# Altium PCB Control_Board_Model_C201_FFC_Sens_Conn.PcbDoc (part 1 of 12)
Units mil, origin at the board's own origin, x right, y up, seen from the top; angles counter-clockwise.
Board outline 3937.01 x 2755.91 mil, 6 copper layers (1-SIG-TOP, 2-GND, 3-PWR, 4-SIG-HOR, 5-SIG-VERT, 6-GND-BOT), stack 46.063 mil thick; 497 components, 379 nets, 1804 pads, 1610 vias.
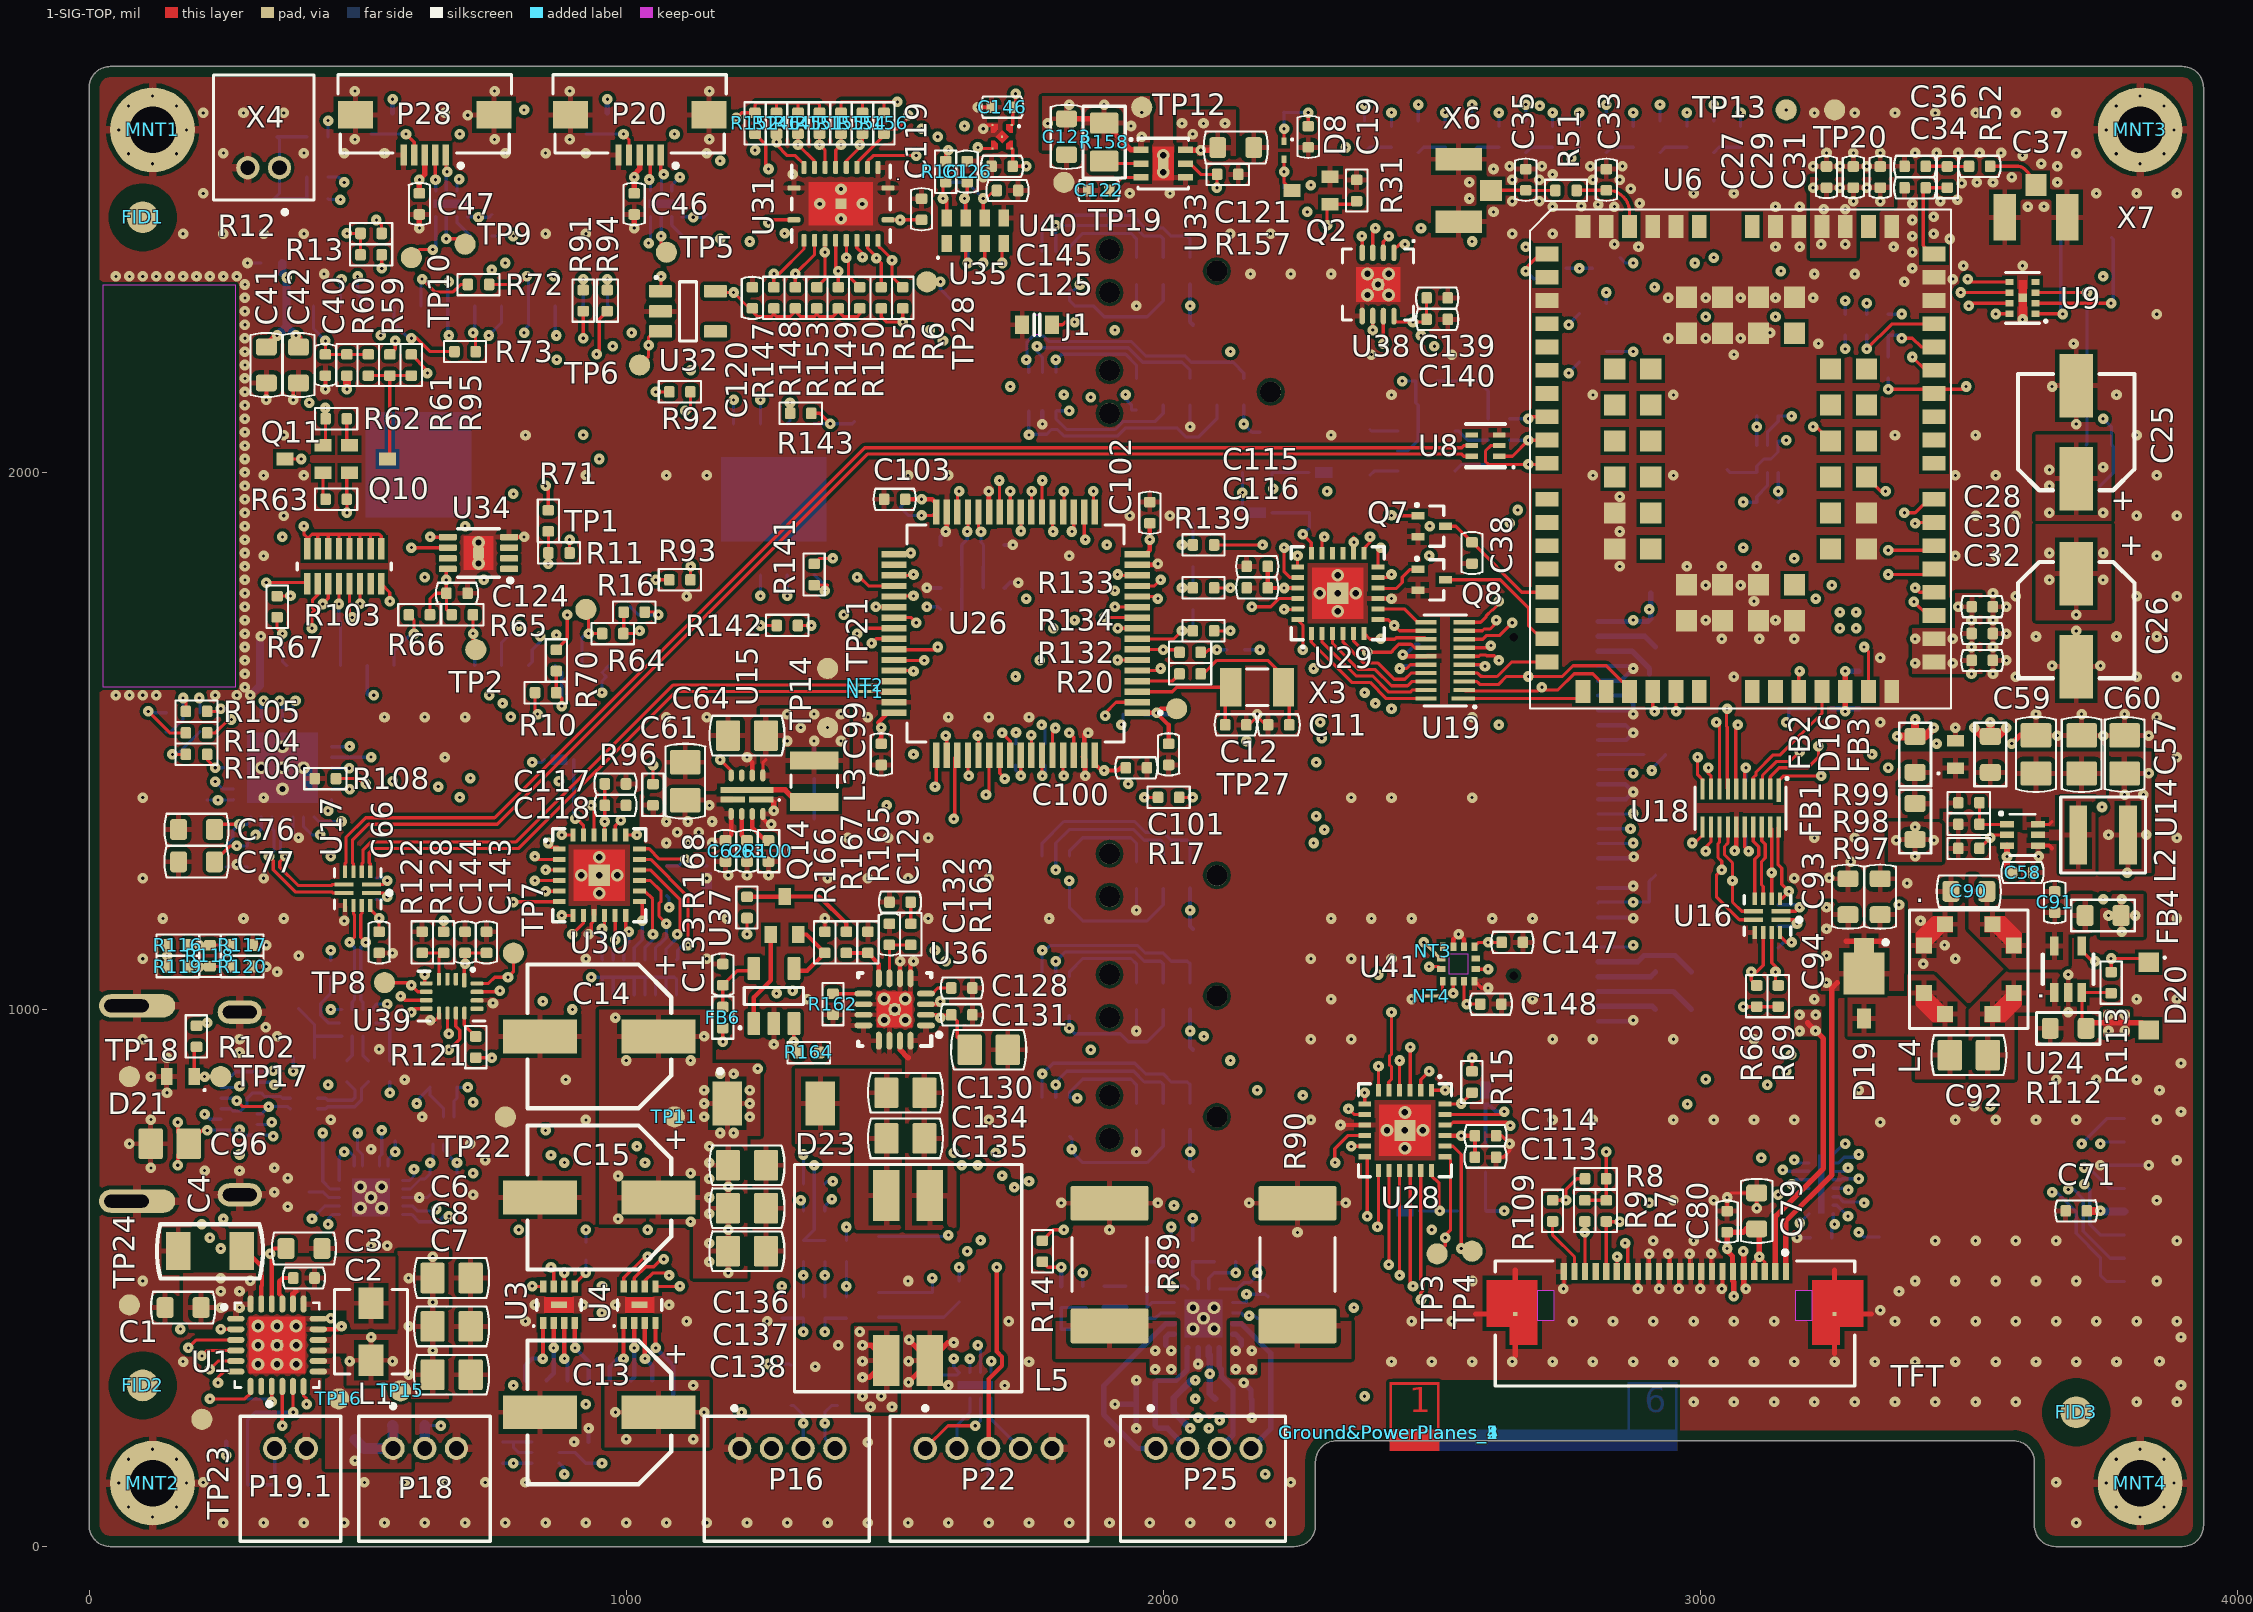
[diagram p0: 1-SIG-TOP view]
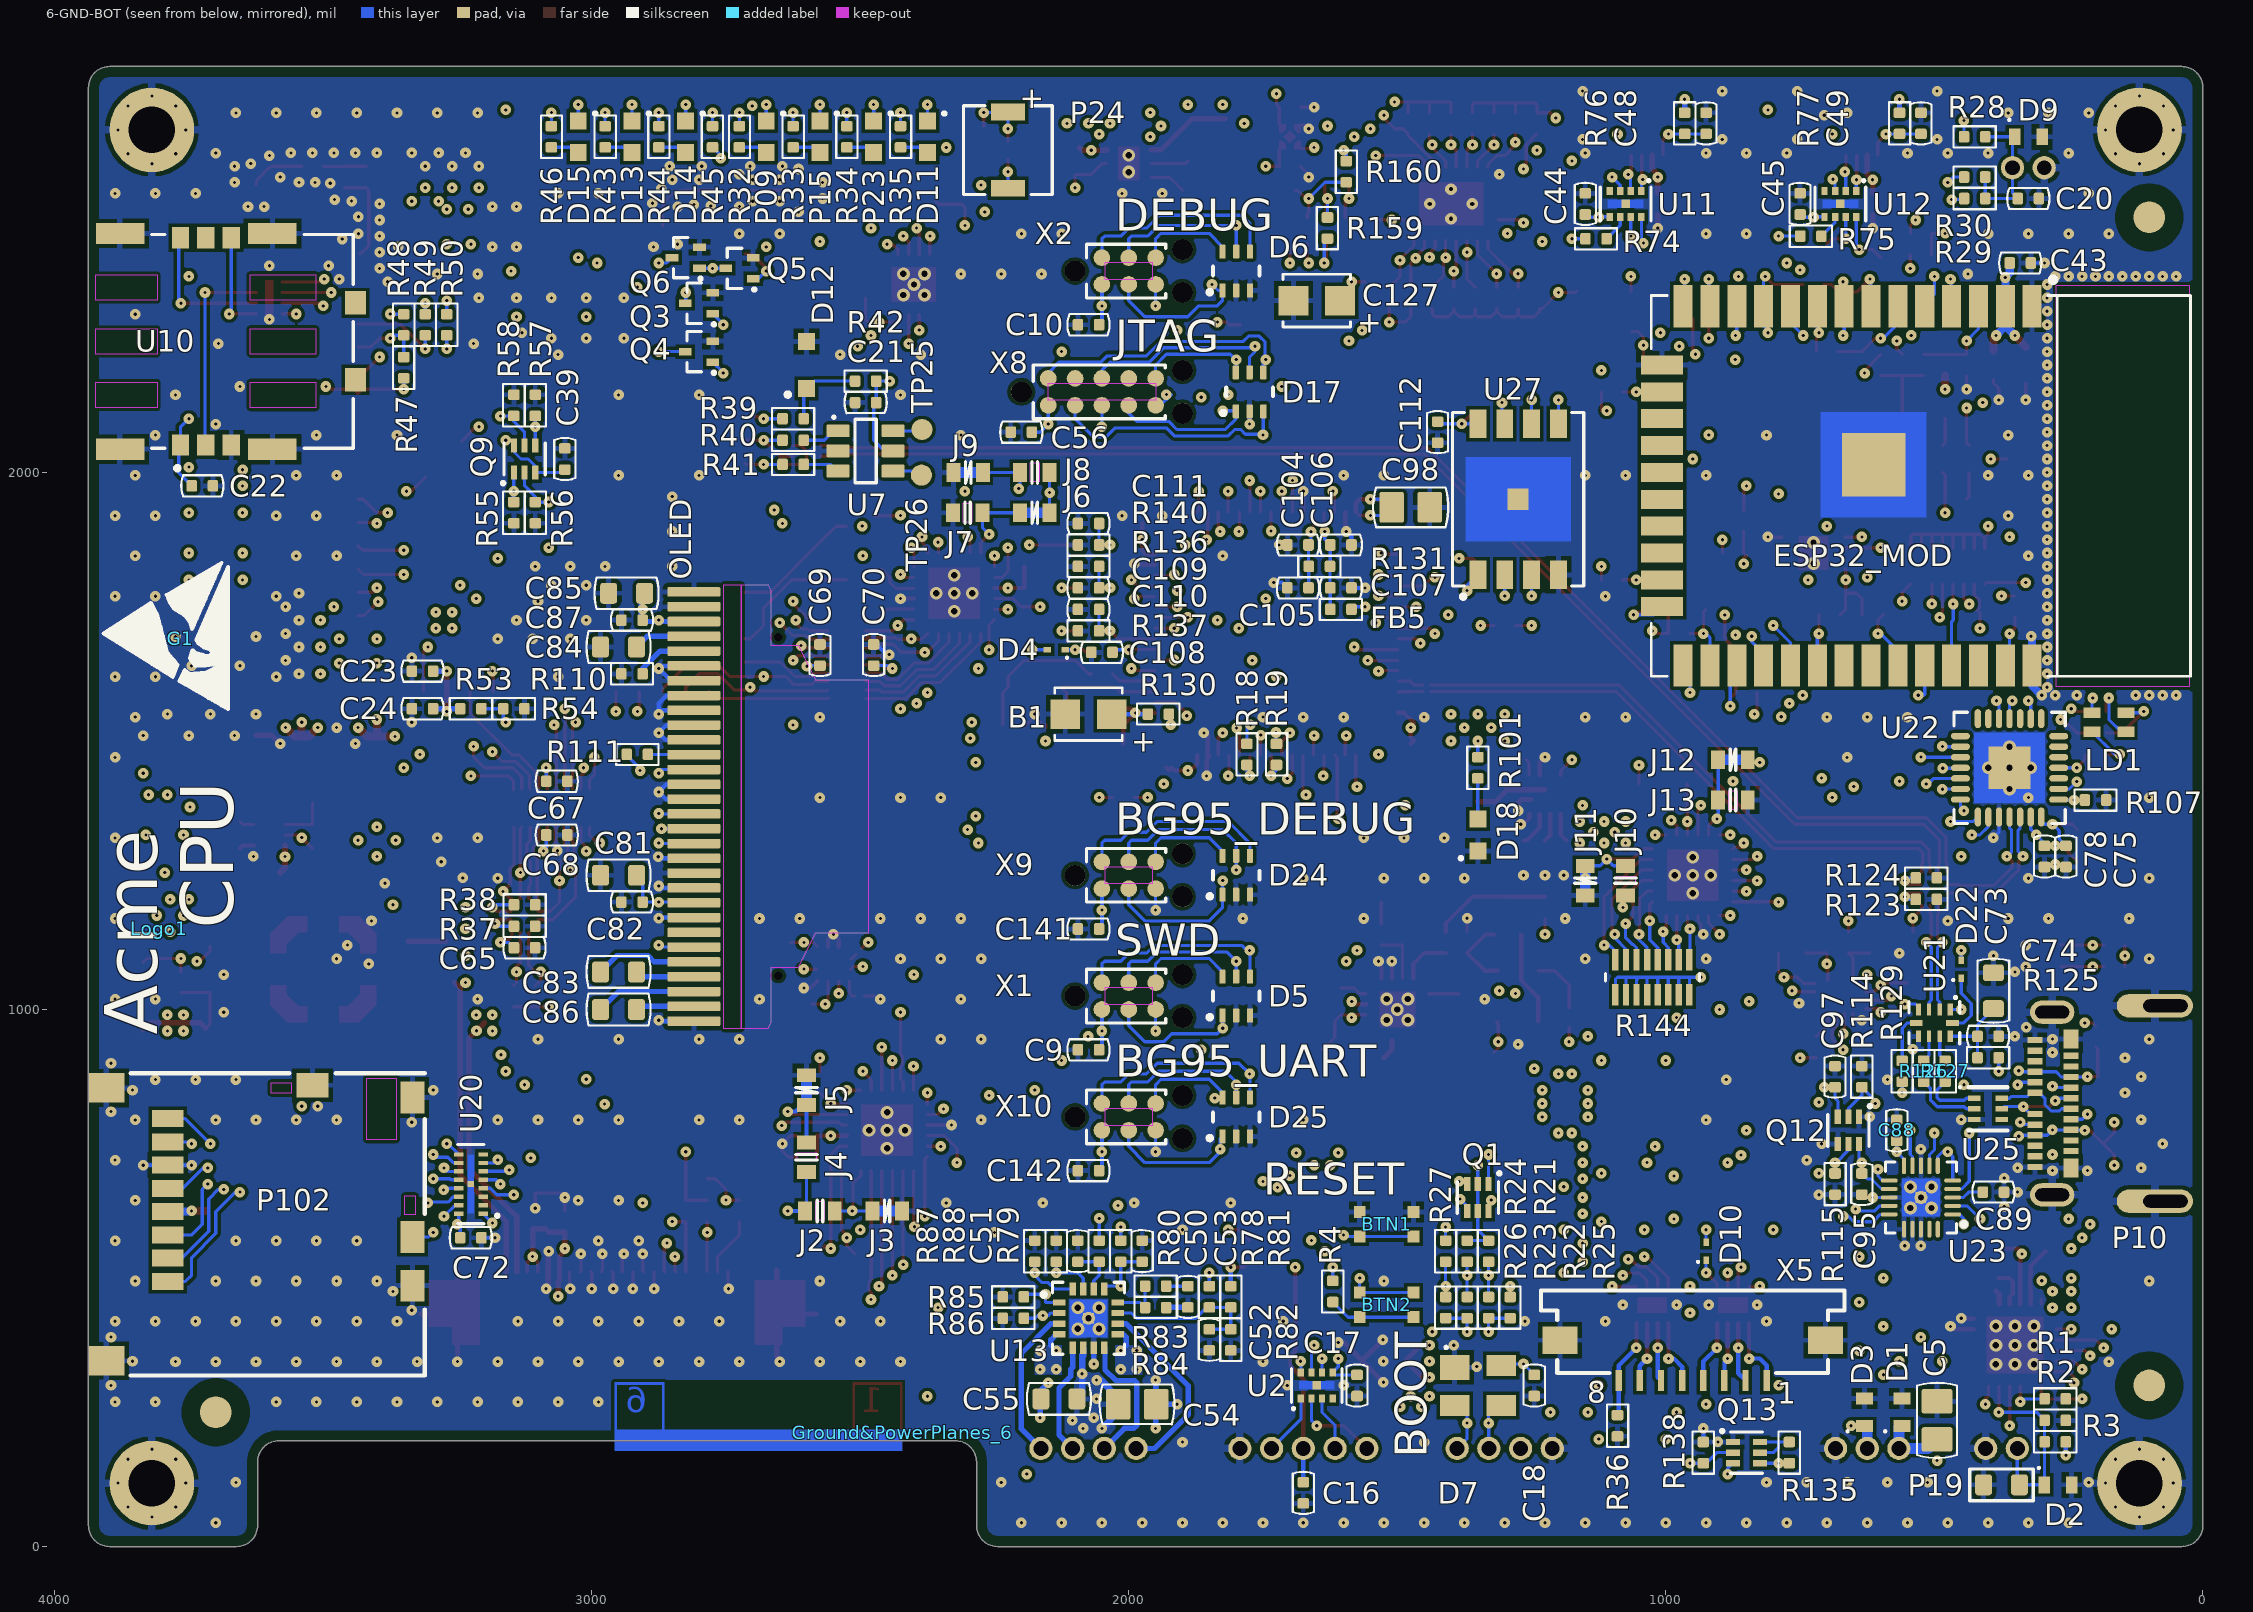
[diagram p1: 6-GND-BOT view, seen from below]
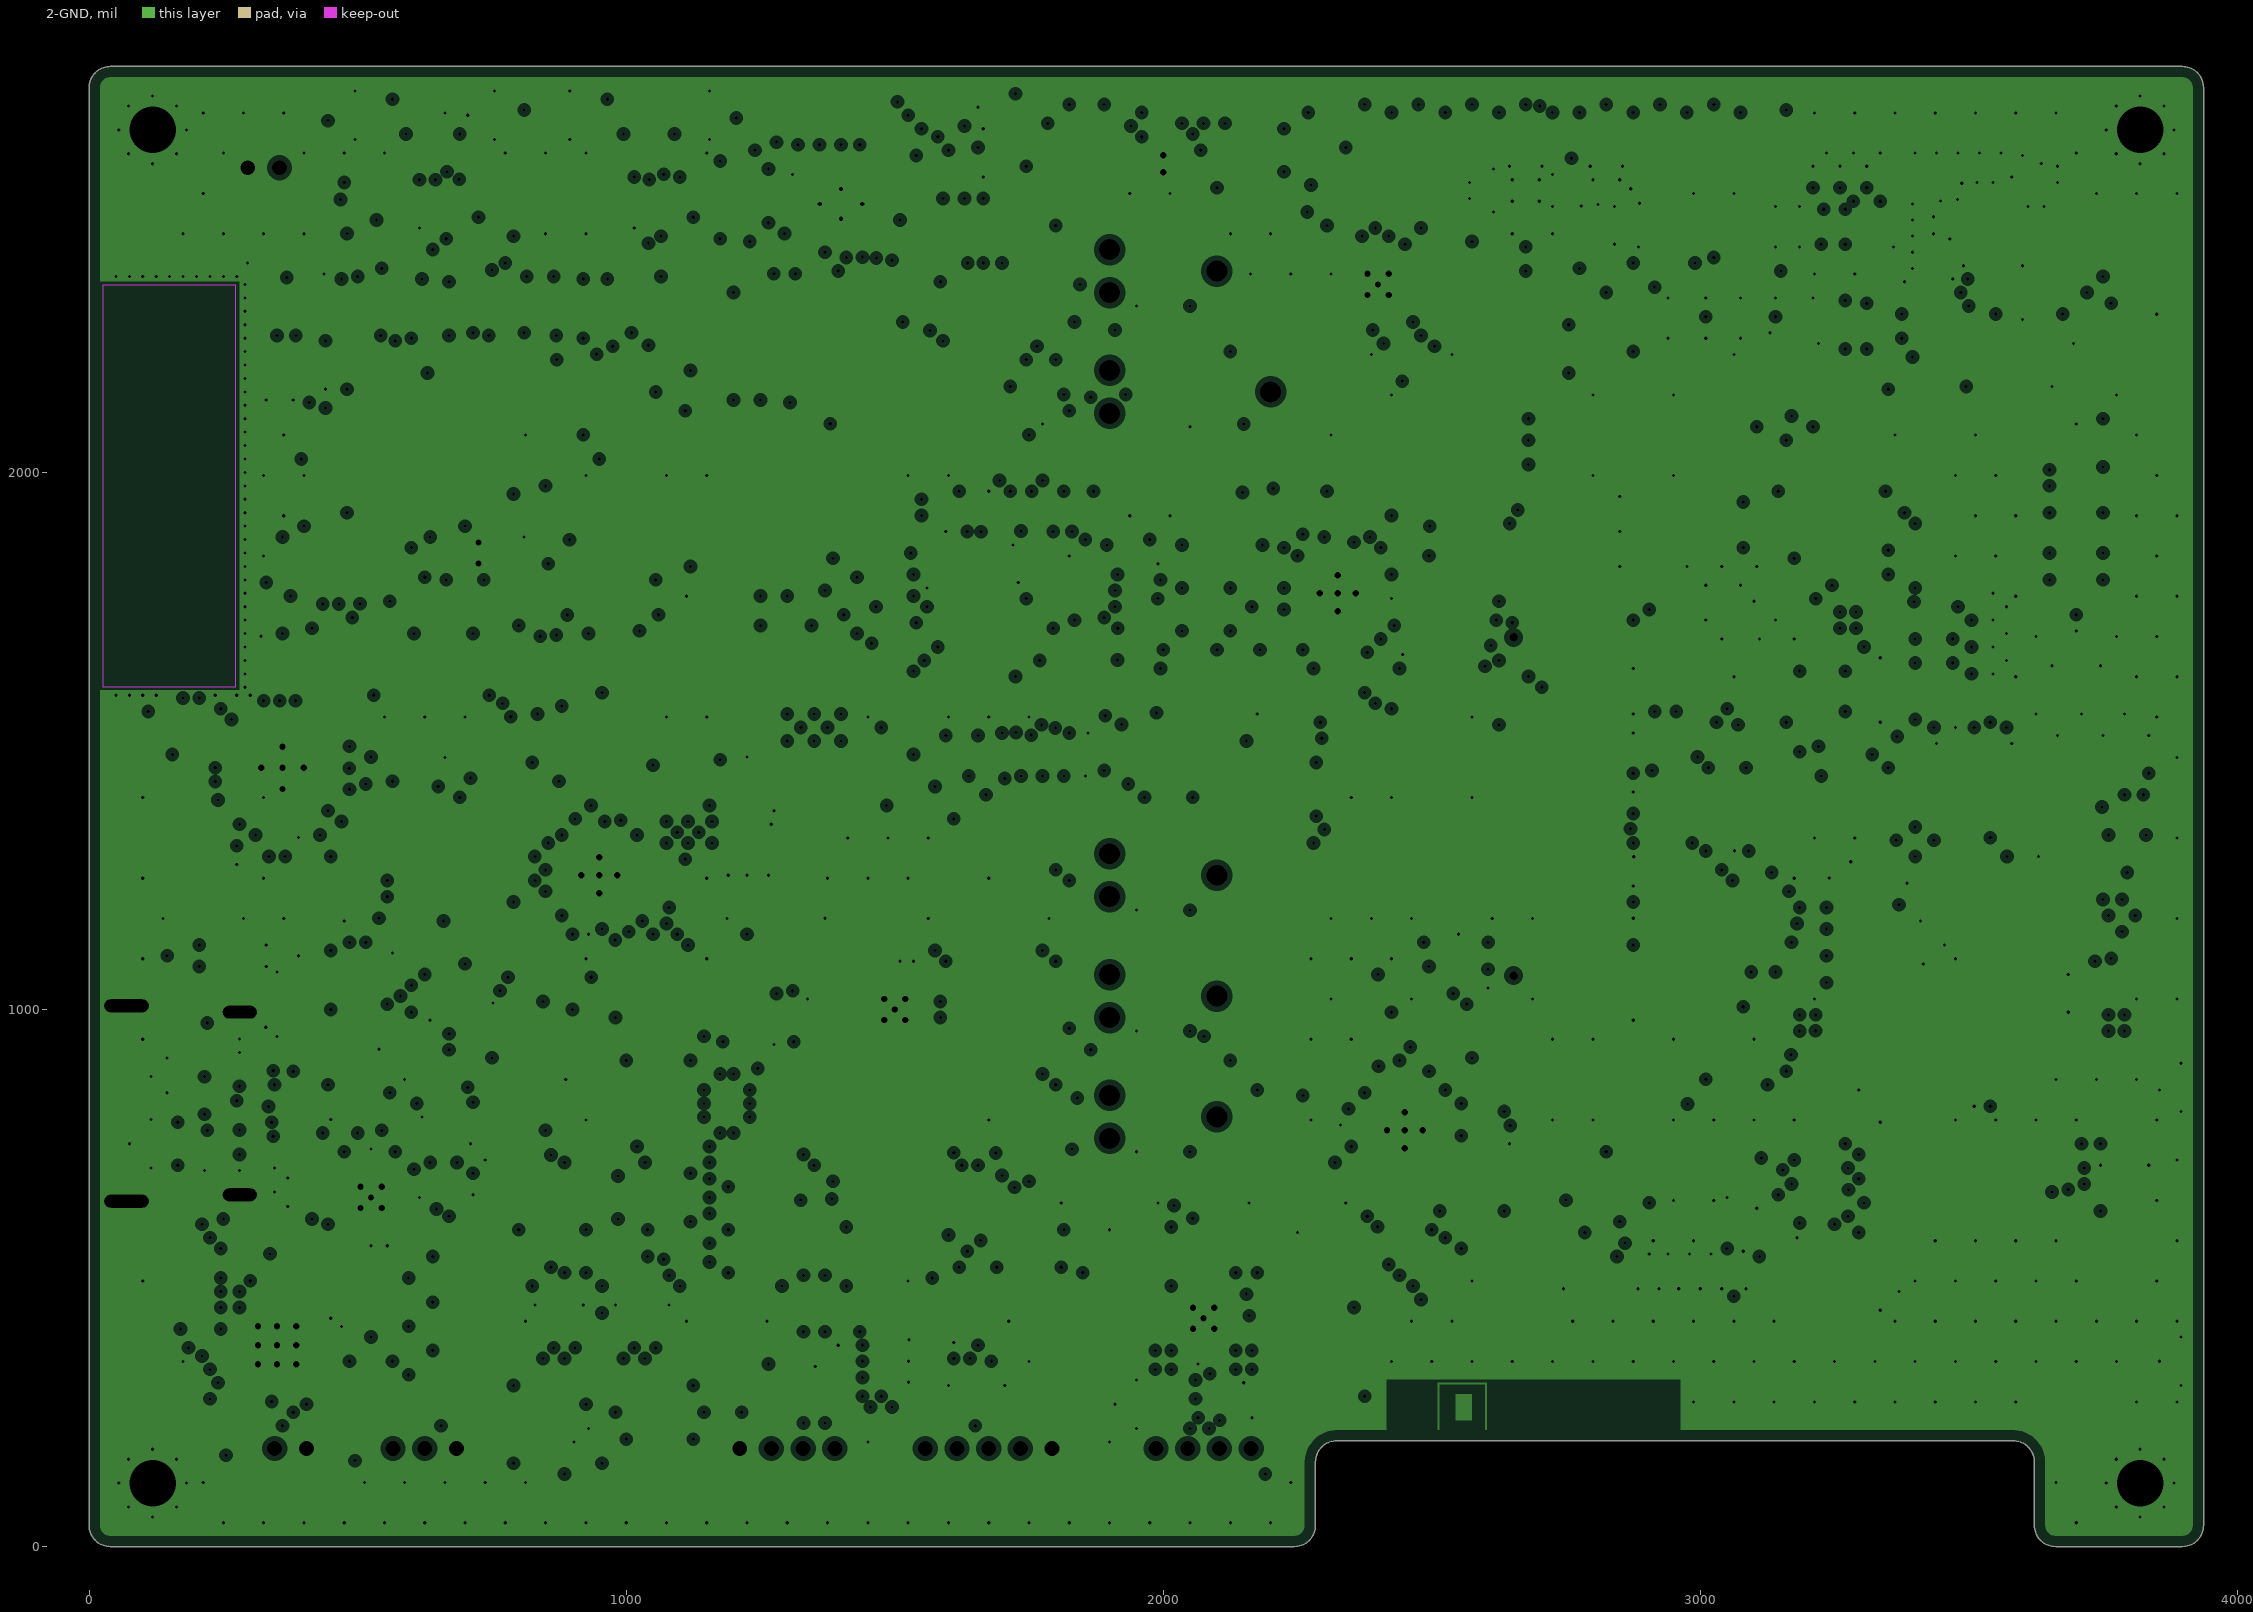
[diagram p2: 2-GND, clearances drawn from the general rule]
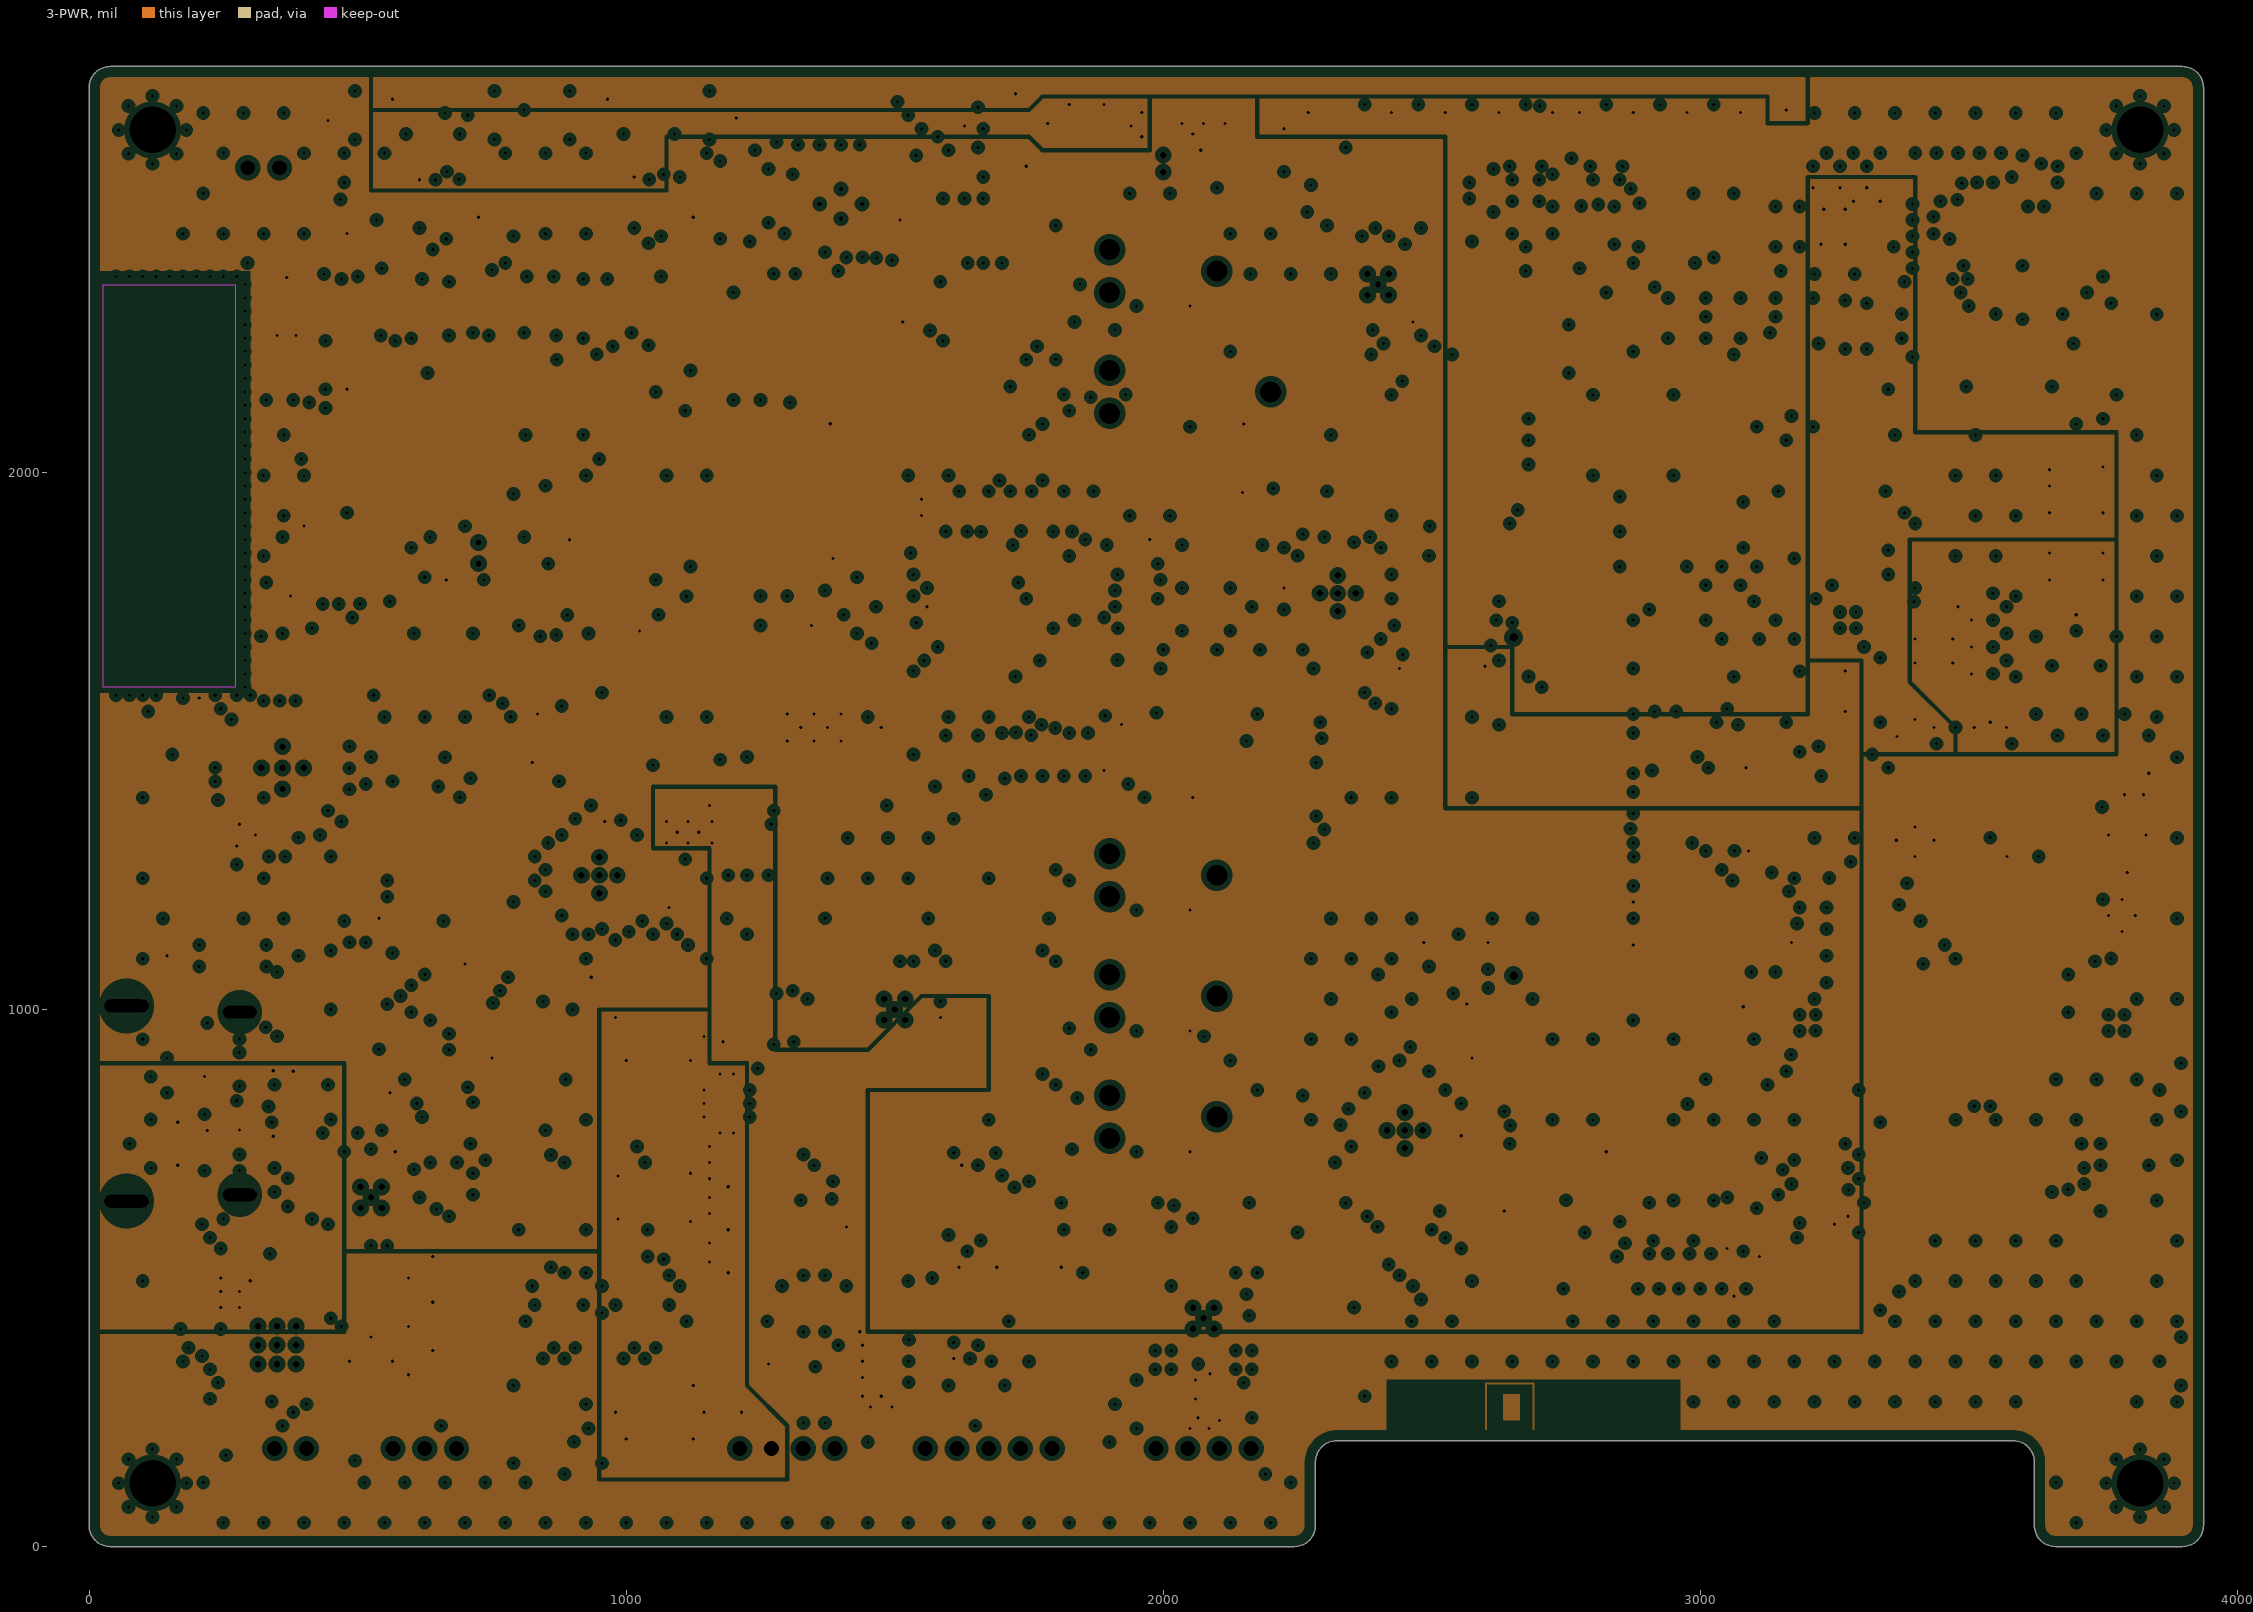
[diagram p3: 3-PWR, clearances drawn from the general rule]
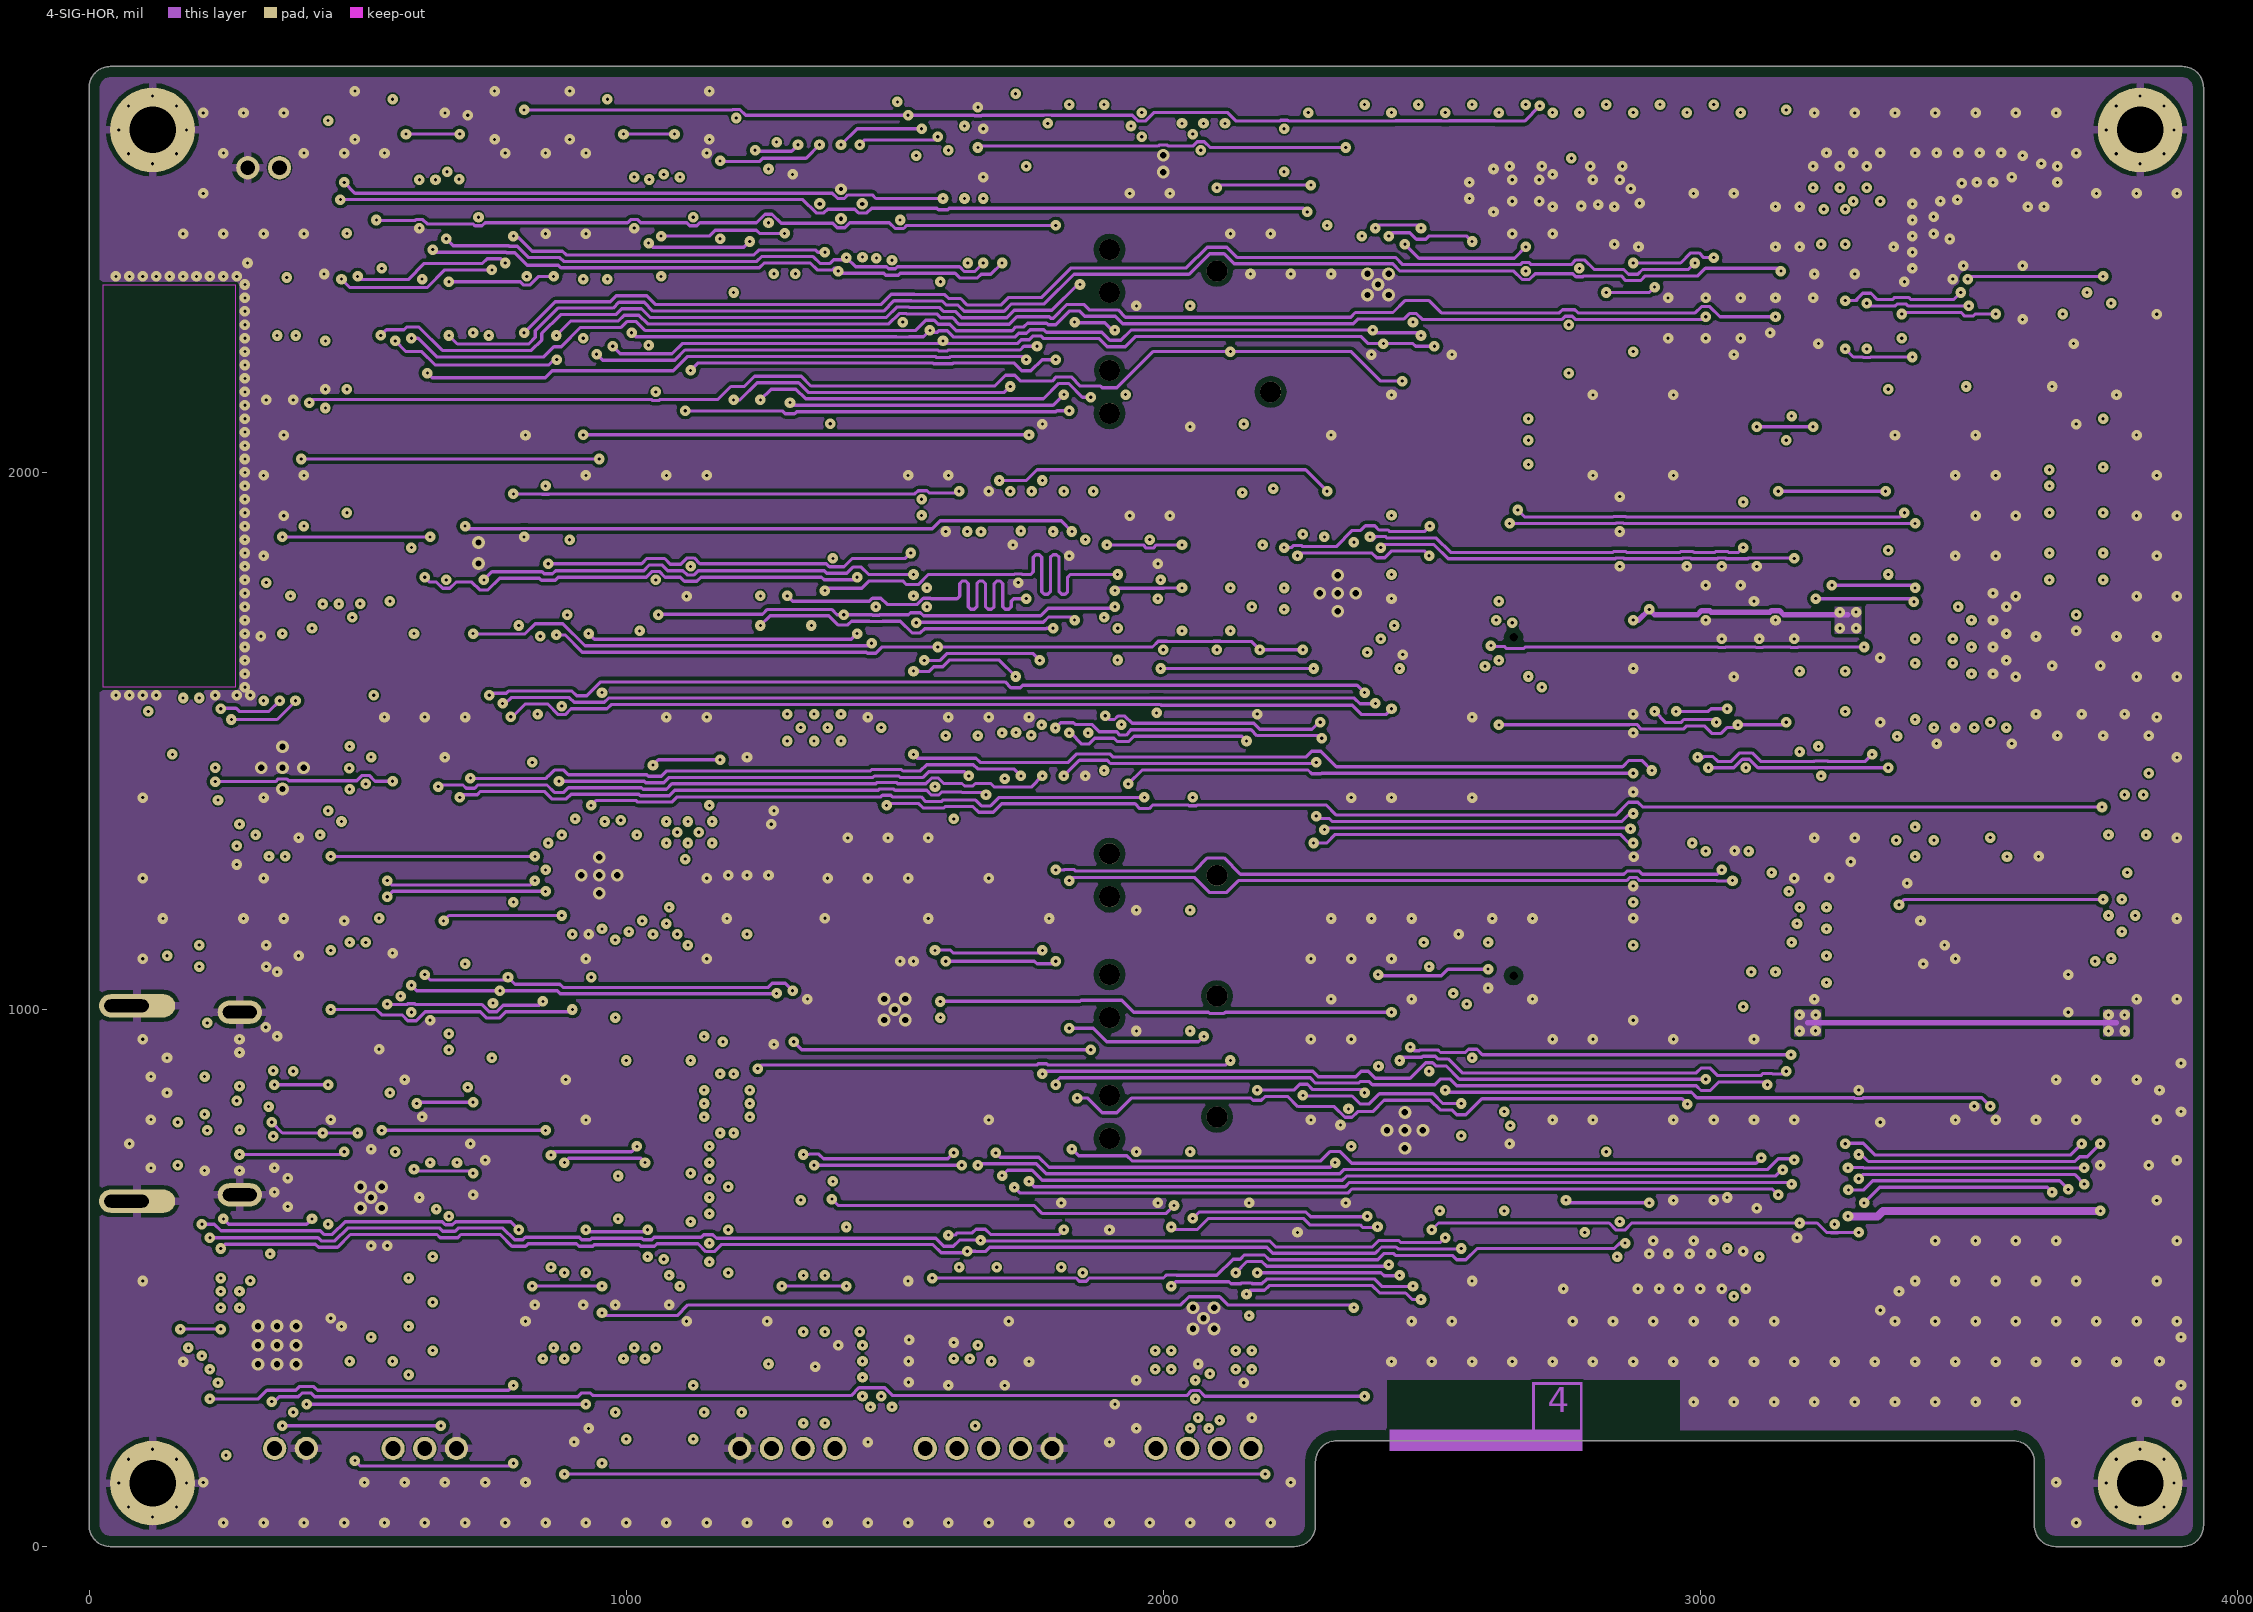
[diagram p4: 4-SIG-HOR]
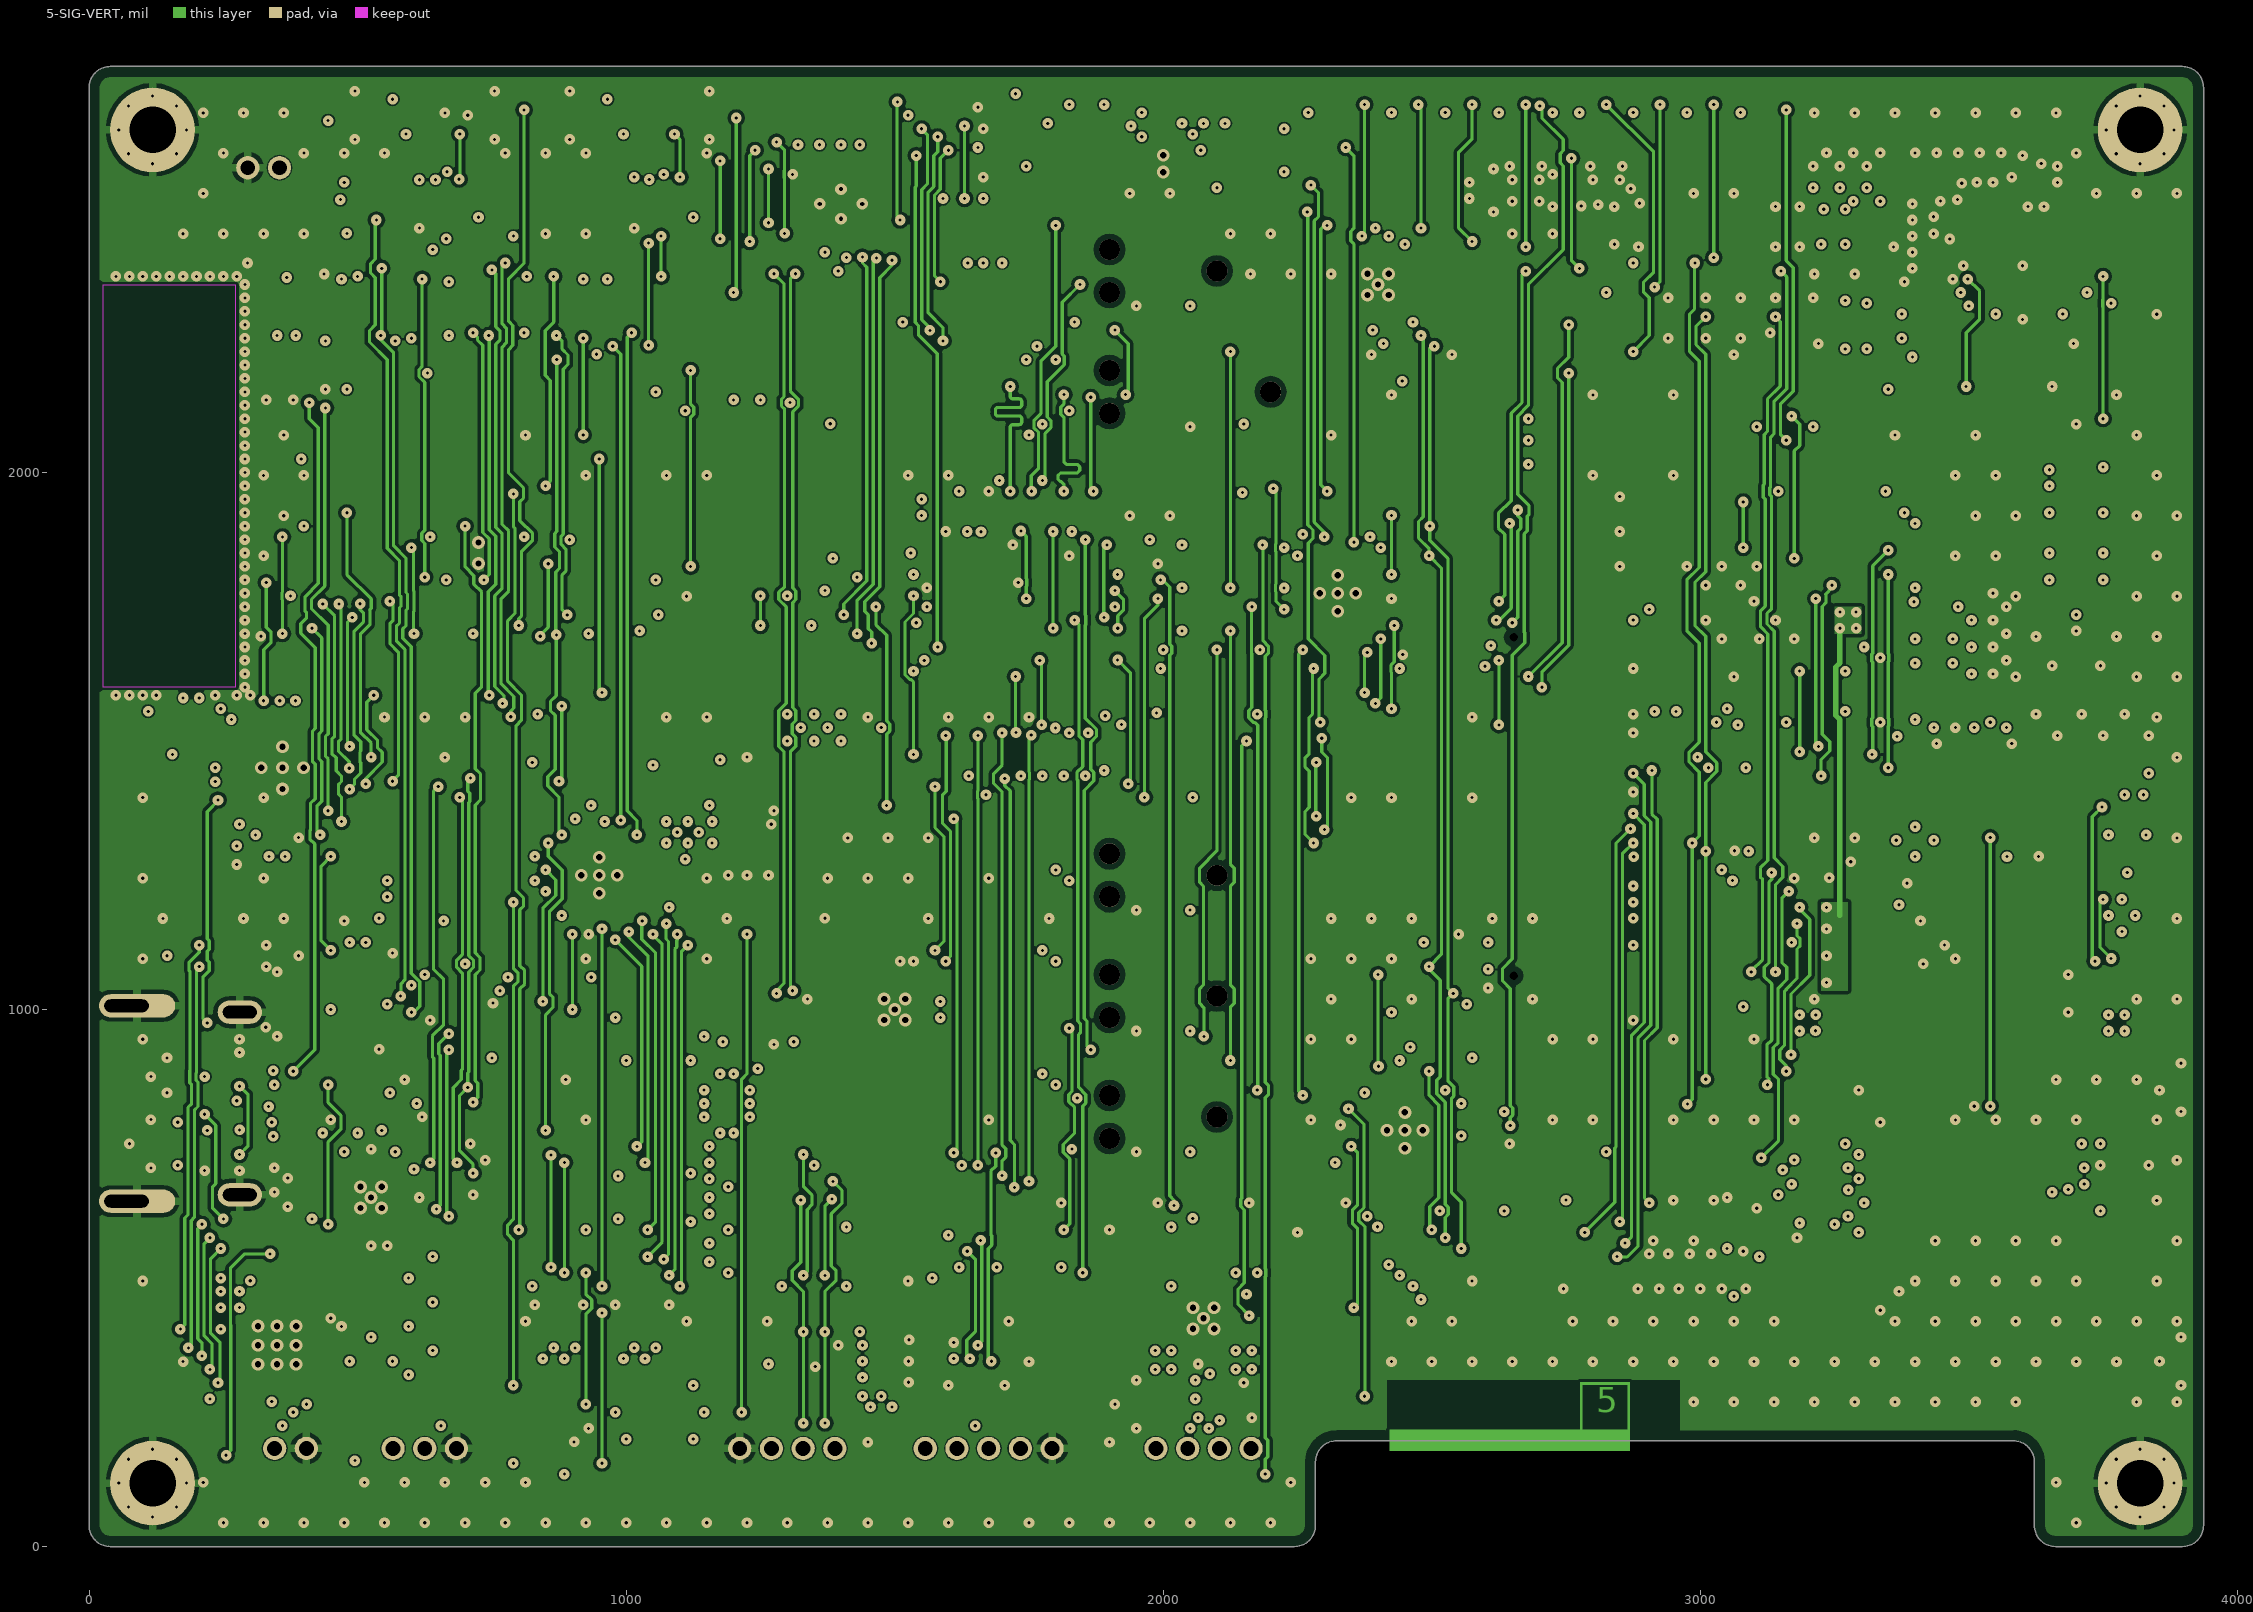
[diagram p5: 5-SIG-VERT]
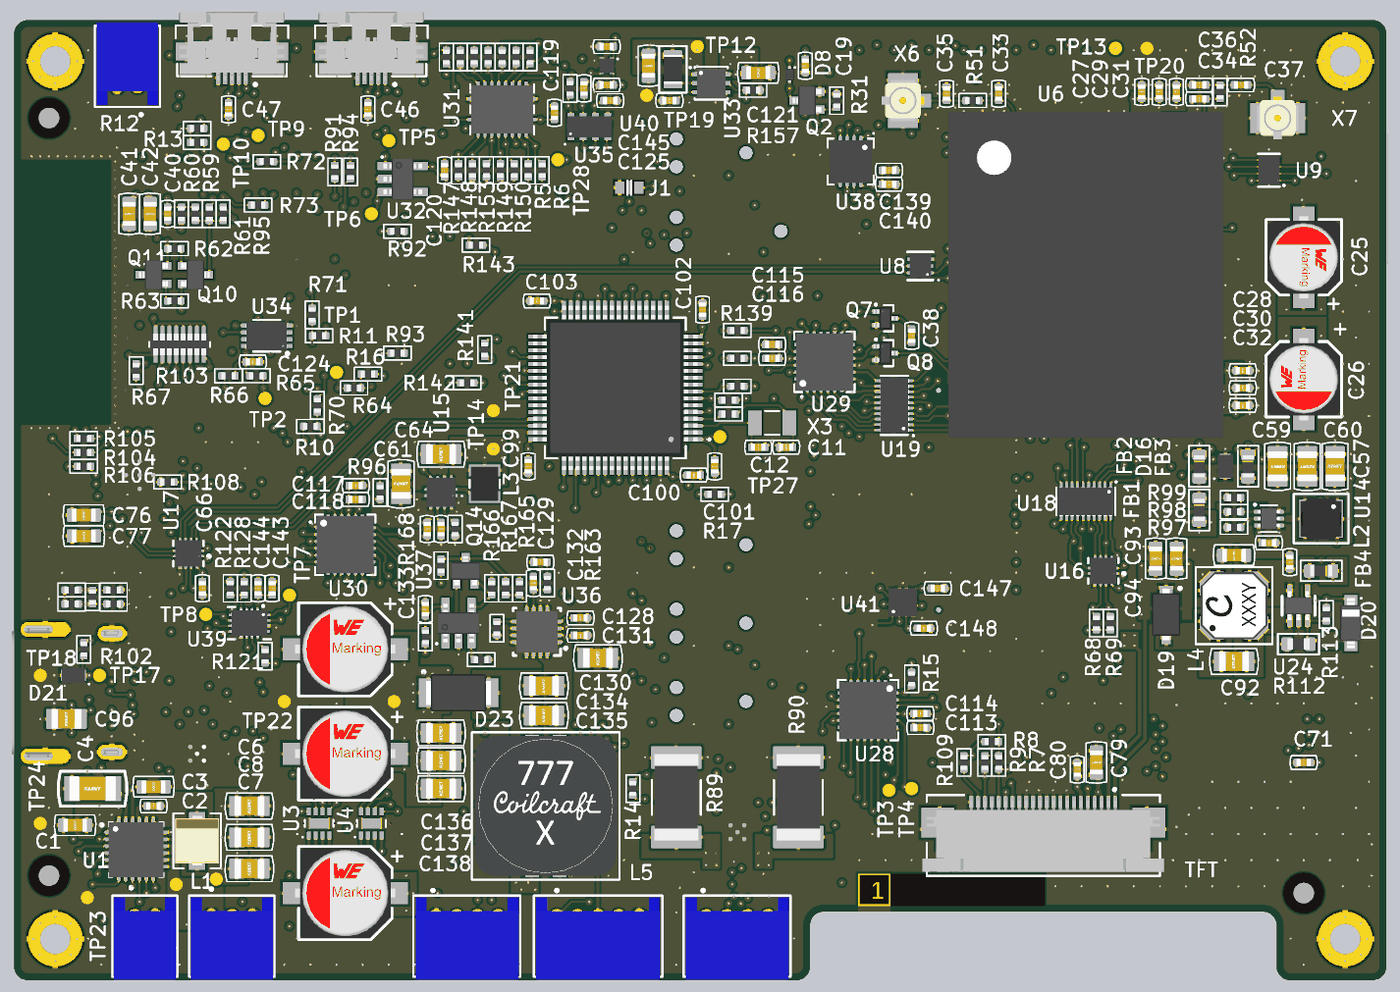
[diagram p12: 3D render of the assembled board from above, using the file's embedded part models]
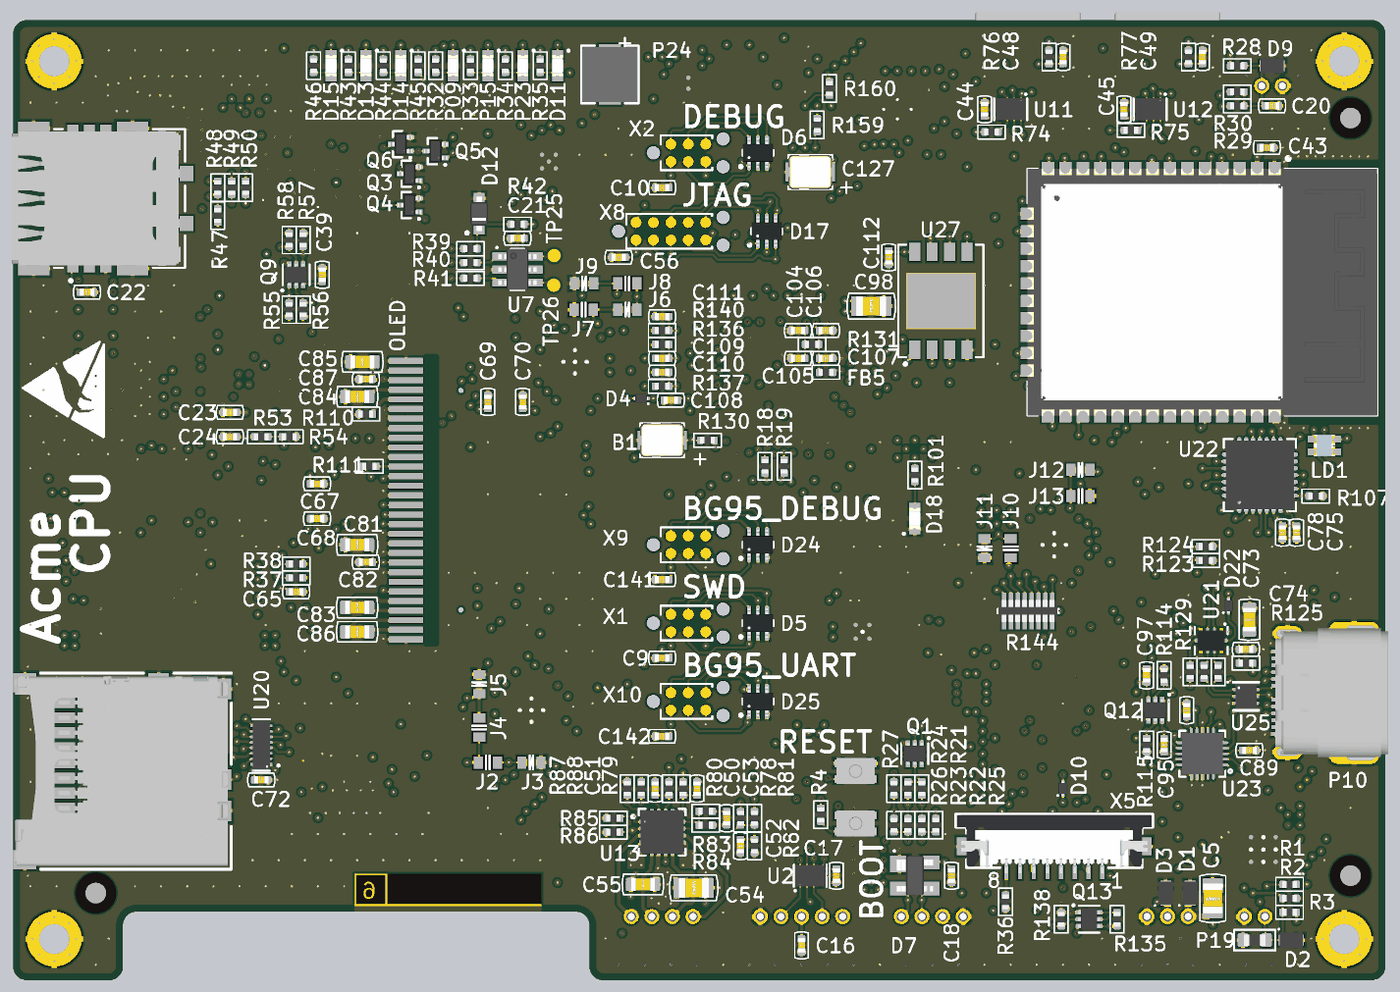
[diagram p13: 3D render of the assembled board from below, using the file's embedded part models]

## Layer stack, top to bottom
Top Solder: solder mask 0.7874, Solder Resist, Dk 3.5
1-SIG-TOP: signal copper 1.378
Dielectric 1: prepreg 4.1339, FR-4, Dk 4.29
2-GND: plane copper 1.378, net GND
Dielectric 3: core 11.811, FR-4, Dk 3.96
3-PWR: plane copper 1.378, net (Multiple Nets)
Dielectric 2: prepreg 5.9055, FR-4, Dk 4.29
4-SIG-HOR: signal copper 1.378
Dielectric 4: core 11.811, FR-4, Dk 3.96
5-SIG-VERT: signal copper 1.378
Dielectric 5: prepreg 4.1339, FR-4, Dk 4.29
6-GND-BOT: signal copper 1.378
Bottom Solder: solder mask 0.7874, Solder Resist, Dk 3.5

## Board outline
0,39.37 ccw(c39.37,39.37) 39.37,0 2244.09,0 ccw(c2244.09,39.37) 2283.46,39.37 2283.46,157.48 cw(c2322.83,157.48) 2322.83,196.85 3582.68,196.85 cw(c3582.68,157.48) 3622.05,157.48 3622.05,39.37 ccw(c3661.42,39.37) 3661.42,0 3897.64,0 ccw(c3897.64,39.37) 3937.01,39.37 3937.01,2716.54 ccw(c3897.64,2716.54) 3897.64,2755.91 39.37,2755.91 ccw(c39.37,2716.54) 0,2716.54

## Design rules (kind name [scope] priority, off if disabled: settings)
BoardOutlineClearance BoardOutlineClearance_LayerStack [WithinRoom('PCB_Stackup')] p1: gap=0 ignorepadtopadclearanceinfootprint=FALSE
BoardOutlineClearance BoardOutlineClearance_LayerNames [WithinRoom('Layer_Names')] p2: gap=0 ignorepadtopadclearanceinfootprint=FALSE
BoardOutlineClearance BoardOutlineClearance_uSD_Slot [HasFootprintPad('5025700893','0')] p3: gap=0 ignorepadtopadclearanceinfootprint=FALSE
BoardOutlineClearance BoardOutlineClearance_USB-C_Conn [HasFootprintPad('MOLEX_2012670005','S3') or HasFootprintPad('MOLEX_2012670005','S4')] p4: gap=0 ignorepadtopadclearanceinfootprint=FALSE
BoardOutlineClearance BoardOutlineClearance_nanoSIM_Slot [HasFootprintPad('1042240820_MOL','G4') or HasFootprintPad('1042240820_MOL','G1') or ((ObjectKind = 'Fill') and HasFootprint('1042240820_MOL'))] p5: gap=0 ignorepadtopadclearanceinfootprint=FALSE
BoardOutlineClearance BoardOutlineClearance_Overlays [OnBottomSilkscreen or OnTopSilkscreen] p6: gap=0 ignorepadtopadclearanceinfootprint=FALSE
BoardOutlineClearance [All] p7: gap=19.68 ignorepadtopadclearanceinfootprint=FALSE
Clearance Clearance_InnerLayers [OnLayer('4-SIG-HOR') or OnLayer('5-SIG-VERT')] p1: gap=6 ignorepadtopadclearanceinfootprint=TRUE except(5.98: Arc-SMDPad Arc-THPad Arc-Via Track-SMDPad Track-THPad Track-Via THPad-THPad THPad-Via THPad-Fill THPad-Poly THPad-Region Via-Via Via-Fill Via-Poly Via-Region; 9.84: Arc-Hole Track-Hole SMDPad-Hole THPad-Hole Via-Hole Fill-Hole Poly-Hole Region-Hole Text-Hole)
Clearance [All] p2: gap=6 ignorepadtopadclearanceinfootprint=FALSE
ComponentClearance ComponentClearance_NetTie [HasFootprint('Net Tie 6x30mil')] p1: gap=0 collisioncheckmode=3 verticalgap=0 showdistances=FALSE
ComponentClearance ComponentClearance_PCB_Stackup [WithinRoom('PCB_Stackup')] p2: gap=0 collisioncheckmode=3 verticalgap=0 showdistances=FALSE
ComponentClearance ComponentClearance_TagConnect [HasFootprint('TC2030-IDC-NL') or HasFootprint('TC2050-IDC-NL')] p3: gap=0 collisioncheckmode=3 verticalgap=0 showdistances=FALSE
ComponentClearance ComponentClearance_Displays [HasFootprint('QG-2864KSWEG01_FLIPPED') vs HasFootprint('CONN_0524352271')] p4: gap=0 collisioncheckmode=3 verticalgap=0 showdistances=FALSE
ComponentClearance [All] p5: gap=12 collisioncheckmode=3 verticalgap=40 showdistances=FALSE
DiffPairsRouting [All] p1: maxlimit=6 minlimit=6 mostfreqgap=6 toplayer_minwidth=6 toplayer_maxwidth=6 toplayer_prefwidth=6 midlayer1_minwidth=6 midlayer1_maxwidth=6 midlayer1_prefwidth=6 midlayer2_minwidth=6 midlayer2_maxwidth=6 midlayer2_prefwidth=6 bottomlayer_minwidth=6 bottomlayer_maxwidth=6 bottomlayer_prefwidth=6 maxuncoupledlength=500
HoleSize [All] p1: absolutevalues=TRUE maxlimit=248.03 minlimit=5.91 maxpercent=80.000 minpercent=20.000
HoleToHoleClearance [All] p1: gap=10 allowstackedmicrovias=FALSE
MatchedLengths MatchedLengths_QSPI [InNetClass('QSPI')] p1: tolerance=50 checknetsindiffpair=FALSE checkdiffpairvsdiffpair=TRUE checkxsignals=TRUE checkothers=TRUE
MinimumAnnularRing MinimumAnnularRing_Via_Int [IsVia and not (OnTopLayer or OnBottomLayer)] p1: minimumring=0
MinimumAnnularRing [All] p2: minimumring=6
MinimumSolderMaskSliver [All] p1: minsoldermaskwidth=3
PlaneClearance [All] p1: clearance=9.84
PlaneConnect PlaneConnect_Via [IsVia] p1: planeconnectstyle=Direct reliefexpansion=20 reliefentries=4 reliefconductorwidth=10 reliefairgap=10
PlaneConnect PlaneConnect_HeatTrap [All] p2: pad.planeconnectstyle=Relief pad.reliefexpansion=6 pad.reliefentries=4 pad.reliefconductorwidth=6 pad.reliefairgap=6 via.planeconnectstyle=Direct via.reliefexpansion=8 via.reliefentries=4 via.reliefconductorwidth=10 via.reliefairgap=10
PolygonConnect PolygonConnect_Via [IsVia] p1: connectstyle=Direct reliefconductorwidth=10 reliefentries=4 polygonreliefangle="90 Angle" airgapwidth=10
PolygonConnect PolygonConnect_TestPoints [InComponentClass('TestPoint')] p2: connectstyle=Direct reliefconductorwidth=10 reliefentries=4 polygonreliefangle="90 Angle" airgapwidth=10
PolygonConnect PolygonConnect_ThermPads [HasFootprintPad('DFN65P100X40-4N','5')] p3: connectstyle=Direct reliefconductorwidth=10 reliefentries=4 polygonreliefangle="90 Angle" airgapwidth=10
PolygonConnect PolygonConnect_BG95_GND [HasFootprint('BG95') and (InNet('GND') or InNetClass('BG95_PWR'))] p4: connectstyle=Direct reliefconductorwidth=10 reliefentries=4 polygonreliefangle="90 Angle" airgapwidth=10
PolygonConnect [All] p5: thpad.connectstyle=Relief thpad.reliefconductorwidth=15 thpad.reliefentries=4 thpad.polygonreliefangle="90 Angle" thpad.airgapwidth=8 smdpad.connectstyle=Relief smdpad.reliefconductorwidth=10 smdpad.reliefentries=4 smdpad.polygonreliefangle="90 Angle" smdpad.airgapwidth=8 via.connectstyle=Direct via.reliefconductorwidth=10 via.reliefentries=4 via.polygonreliefangle="90 Angle" via.airgapwidth=10
RoomDefinition Layer_Names [False] p1: confinementstyle=ConfineIn formatcopy=TRUE lockcomponents=FALSE outline 4625.98,2755.91 5413.39,2755.91 5413.39,2066.93 4625.98,2066.93
RoomDefinition PCB_Stackup [False] p2: confinementstyle=ConfineIn formatcopy=TRUE lockcomponents=FALSE outline 2415,315 2415,175 2975,175 2975,315
RoomDefinition +1V8_PS [InComponentClass('+1V8_PS')] p3: confinementstyle=ConfineIn formatcopy=TRUE lockcomponents=FALSE outline 1650,2700 1650,2550 1750,2550 1750,2700
RoomDefinition AUTH [InComponentClass('AUTH')] p4: confinementstyle=ConfineIn formatcopy=TRUE lockcomponents=FALSE outline 575,1800 825,1800 825,1900 575,1900
RoomDefinition P128 [InComponentClass('P128')] p5: confinementstyle=ConfineIn formatcopy=TRUE lockcomponents=FALSE outline 2475,1150 2475,1050 2700,1050 2700,1150
RoomDefinition FLASH [InComponentClass('FLASH')] p6: confinementstyle=ConfineIn formatcopy=TRUE lockcomponents=FALSE outline 1400,1750 1150,1750 1150,2175 1400,2175
RoomDefinition P105 [InComponentClass('P105')] p7: confinementstyle=ConfineIn formatcopy=TRUE lockcomponents=FALSE outline 1000,2200 1000,2360 1200,2360 1200,2200
RoomDefinition U_ESP32-WROOM32D_Module [InComponentClass('U_ESP32-WROOM32D_Module')] p8: confinementstyle=ConfineIn formatcopy=TRUE lockcomponents=FALSE outline 1075,2425 25,2425 25,1575 1075,1575
RoomDefinition TCPP [InComponentClass('TCPP')] p9: confinementstyle=ConfineIn formatcopy=TRUE lockcomponents=FALSE outline 500,700 500,1000 775,1000 775,700
RoomDefinition USB_SW [InComponentClass('USB_SW')] p10: confinementstyle=ConfineIn formatcopy=TRUE lockcomponents=FALSE outline 350,1080 645.93,1080 645.93,855 350,855
RoomDefinition UART_MUX [InComponentClass('UART_MUX')] p11: confinementstyle=ConfineIn formatcopy=TRUE lockcomponents=FALSE outline 3050,1100 3200,1100 3200,1250 3050,1250
RoomDefinition +1V8_VLT2 [InComponentClass('+1V8_VLT2')] p12: confinementstyle=ConfineIn formatcopy=TRUE lockcomponents=FALSE outline 2975,1300 3175,1300 3175,1450 2975,1450
RoomDefinition +1V8_VLT1 [InComponentClass('+1V8_VLT1')] p13: confinementstyle=ConfineIn formatcopy=TRUE lockcomponents=FALSE outline 2450,1550 2600,1550 2600,1750 2450,1750
RoomDefinition DISP_PS [InComponentClass('DISP_PS')] p14: confinementstyle=ConfineIn formatcopy=TRUE lockcomponents=FALSE outline 3250,950 3850,950 3850,1250 3250,1250
RoomDefinition STM32G473CETx [InComponentClass('STM32G473CETx')] p15: confinementstyle=ConfineIn formatcopy=TRUE lockcomponents=FALSE outline 2000,1425 2000,2000 1450,2000 1450,1425
RoomDefinition P110 [InComponentClass('P110')] p16: confinementstyle=ConfineIn formatcopy=TRUE lockcomponents=FALSE outline 2275,250 1775,250 1775,600 2275,600
RoomDefinition USB_MUX [InComponentClass('USB_MUX')] p17: confinementstyle=ConfineIn formatcopy=TRUE lockcomponents=FALSE outline 275,1175 450,1175 450,1300 275,1300
RoomDefinition P021 [InComponentClass('P021')] p18: confinementstyle=ConfineIn formatcopy=TRUE lockcomponents=FALSE outline 2275,2500 1750,2500 1750,2250 2275,2250
RoomDefinition P023 [InComponentClass('P023')] p19: confinementstyle=ConfineIn formatcopy=TRUE lockcomponents=FALSE outline 2275,925 1750,925 1750,675 2275,675
RoomDefinition P022 [InComponentClass('P022')] p20: confinementstyle=ConfineIn formatcopy=TRUE lockcomponents=FALSE outline 2275,1375 1750,1375 1750,1125 2275,1125
RoomDefinition U_TS3USBCA410_USB_C_SBU_Multiplexer [InComponentClass('U_TS3USBCA410_USB_C_SBU_Multiplexer')] p21: confinementstyle=ConfineIn formatcopy=TRUE lockcomponents=FALSE outline 375,975 600,975 600,1175 375,1175
RoomDefinition JTAG [InComponentClass('JTAG')] p22: confinementstyle=ConfineIn formatcopy=TRUE lockcomponents=FALSE outline 2250,2050 1725,2050 1725,2250 2250,2250
RoomDefinition P012 [InComponentClass('P012')] p23: confinementstyle=ConfineIn formatcopy=TRUE lockcomponents=FALSE outline 2275,1150 1750,1150 1750,900 2275,900
RoomDefinition U_CP2102N_USB-to-UART_Bridge [InComponentClass('U_CP2102N_USB-to-UART_Bridge')] p24: confinementstyle=ConfineIn formatcopy=TRUE lockcomponents=FALSE outline 635,1225 140,1225 140,1650 635,1650
RoomDefinition U_PCA9632_4-Ch_LED_Driver [InComponentClass('U_PCA9632_4-Ch_LED_Driver')] p25: confinementstyle=ConfineIn formatcopy=TRUE lockcomponents=FALSE outline 2325,2450 2325,2175 2475,2175 2475,2450
RoomDefinition P31.1 [InComponentClass('P31.1')] p26: confinementstyle=ConfineIn formatcopy=TRUE lockcomponents=FALSE outline 2475,825 3575,825 3575,1950 2475,1950
RoomDefinition P102 [InComponentClass('P102')] p27: confinementstyle=ConfineIn formatcopy=TRUE lockcomponents=FALSE outline 3300,300 3300,900 4160,900 4160,300
RoomDefinition P16_P25 [InComponentClass('P16_P25')] p28: confinementstyle=ConfineIn formatcopy=TRUE lockcomponents=FALSE outline 750,0 2250,0 2250,600 750,600
RoomDefinition P103 [InComponentClass('P103')] p29: confinementstyle=ConfineIn formatcopy=TRUE lockcomponents=FALSE outline 1125,300 1750,300 1750,1225 1125,1225
RoomDefinition SENS [InComponentClass('SENS')] p30: confinementstyle=ConfineIn formatcopy=TRUE lockcomponents=FALSE outline 1225,2775 425,2775 425,2475 1225,2475
RoomDefinition "U_TPS22810 2" [InComponentClass('U_TPS22810 2')] p31: confinementstyle=ConfineIn formatcopy=TRUE lockcomponents=FALSE outline 1775,2500 2175,2500 2175,2675 1775,2675
RoomDefinition TCPC [InComponentClass('TCPC')] p32: confinementstyle=ConfineIn formatcopy=TRUE lockcomponents=FALSE outline 0,625 775,625 775,1175 0,1175
RoomDefinition P109 [InComponentClass('P109')] p33: confinementstyle=ConfineIn formatcopy=TRUE lockcomponents=FALSE outline 2325,1125 3900,1125 3900,2675 2325,2675
RoomDefinition I2C_SW [InComponentClass('I2C_SW')] p34: confinementstyle=ConfineIn formatcopy=TRUE lockcomponents=FALSE outline 1550,2700 1225,2700 1225,2300 1550,2300
RoomDefinition BC [InComponentClass('BC')] p35: confinementstyle=ConfineIn formatcopy=TRUE lockcomponents=FALSE outline 50,25 775,25 775,600 50,600
RoomDefinition +4V2_PS [InComponentClass('+4V2_PS')] p36: confinementstyle=ConfineIn formatcopy=TRUE lockcomponents=FALSE outline 3450,1225 3850,1225 3850,1550 3450,1550
RoomDefinition +3V3_PS [InComponentClass('+3V3_PS')] p37: confinementstyle=ConfineIn formatcopy=TRUE lockcomponents=FALSE outline 1425,1575 1125,1575 1125,1250 1425,1250
RoomDefinition 16xIO_3 [InComponentClass('16xIO_3')] p38: confinementstyle=ConfineIn formatcopy=FALSE lockcomponents=FALSE outline 675,1425 675,975 1150,975 1150,1425
RoomDefinition 16xIO_2 [InComponentClass('16xIO_2')] p39: confinementstyle=ConfineIn formatcopy=TRUE lockcomponents=FALSE outline 2425,1675 2425,1900 2150,1900 2150,1675
RoomDefinition 16xIO_1 [InComponentClass('16xIO_1')] p40: confinementstyle=ConfineIn formatcopy=TRUE lockcomponents=FALSE outline 2350,875 2350,600 2650,600 2650,875
RoutingVias [All] p1: holewidth=5.91 width=19.68 viastyle="Through Hole" minholewidth=5.91 minwidth=19.68 maxholewidth=19.68 maxwidth=27.56
SilkToSilkClearance [All] p1: silktosilkclearance=1
SilkToSolderMaskClearance [IsPad] p1: minsilkscreentomaskgap=4 clearancetoexposedcopper=FALSE
SolderMaskExpansion [All] p1: expansion=2
Width "Schematic Width Constraint_4" [InNet('NetC37_2')] p1: maxlimit=44.61 minlimit=4.01 preferedwidth=38.03 toplayer_maxwidth=6.06 toplayer_prefwidth=4.96 midlayer1_minwidth=7.02 midlayer1_maxwidth=10.02 midlayer1_prefwidth=8.41 midlayer2_minwidth=24.74 midlayer2_maxwidth=34.23 midlayer2_prefwidth=29.12 bottomlayer_minwidth=32.38 impedancedriven=TRUE minimp=45.000000 maximp=55.000000 favimp=50.000000
Width "Schematic Width Constraint_3" [InNet('NetC36_2')] p2: maxlimit=44.61 minlimit=4.01 preferedwidth=38.03 toplayer_maxwidth=6.06 toplayer_prefwidth=4.96 midlayer1_minwidth=7.02 midlayer1_maxwidth=10.02 midlayer1_prefwidth=8.41 midlayer2_minwidth=24.74 midlayer2_maxwidth=34.23 midlayer2_prefwidth=29.12 bottomlayer_minwidth=32.38 impedancedriven=TRUE minimp=45.000000 maximp=55.000000 favimp=50.000000
Width "Schematic Width Constraint_2" [InNet('NetC35_2')] p3: maxlimit=44.61 minlimit=4.01 preferedwidth=38.03 toplayer_maxwidth=6.06 toplayer_prefwidth=4.96 midlayer1_minwidth=7.02 midlayer1_maxwidth=10.02 midlayer1_prefwidth=8.41 midlayer2_minwidth=24.74 midlayer2_maxwidth=34.23 midlayer2_prefwidth=29.12 bottomlayer_minwidth=32.38 impedancedriven=TRUE minimp=45.000000 maximp=55.000000 favimp=50.000000
Width "Schematic Width Constraint_1" [InNet('NetC34_2')] p4: maxlimit=44.61 minlimit=4.01 preferedwidth=38.03 toplayer_maxwidth=6.06 toplayer_prefwidth=4.96 midlayer1_minwidth=7.02 midlayer1_maxwidth=10.02 midlayer1_prefwidth=8.41 midlayer2_minwidth=24.74 midlayer2_maxwidth=34.23 midlayer2_prefwidth=29.12 bottomlayer_minwidth=32.38 impedancedriven=TRUE minimp=45.000000 maximp=55.000000 favimp=50.000000
Width "Schematic Width Constraint" [InNet('NetC33_2')] p5: maxlimit=44.61 minlimit=4.01 preferedwidth=38.03 toplayer_maxwidth=6.06 toplayer_prefwidth=4.96 midlayer1_minwidth=7.02 midlayer1_maxwidth=10.02 midlayer1_prefwidth=8.41 midlayer2_minwidth=24.74 midlayer2_maxwidth=34.23 midlayer2_prefwidth=29.12 bottomlayer_minwidth=32.38 impedancedriven=TRUE minimp=45.000000 maximp=55.000000 favimp=50.000000
Width [All] p6: maxlimit=200 minlimit=6 preferedwidth=10
21 further rules are at their usual default settings.

## Classes and differential pairs
net class BG95_PWR: NetC25_1 NetC26_1
component class TCPP: C88 C89 C95 C97 Q12 R114 R115 U23
component class U_PCA9632_4-Ch_LED_Driver: C139 C140 U38
component class I2C_SW: C119 R145 R146 R147 R148 R149 R150 R151 R152 R153 R154 R155 R156 U31
component class +3V3_PS: C61 C62 C63 C64 D18 L3 R96 R100 R101 U15
component class FLASH: C112 R141 R142 R143 U27
component class P103: C128 C129 C130 C131 C132 C133 C134 C135 C136 C137 C138 D23 FB6 L5 Q14 R162 R163 R164 R165 R166 R167 R168 U36 U37
component class P16_P25: C13 C14 C15 C16 C17 C18 D7 P16 P22 P25 Q1 R21 R22 R23 R24 R25 R26 R27 U2
component class SENS: C44 C45 C46 C47 C48 C49 P20 P28 R74 R75 R76 R77 U11 U12
component class PCB_FEATURE: Logo1
channel class TS3USB3031_2-ch_2p3t_Multiplexer: UART_MUX USB_MUX
channel class TC2030-NL_TagConnect_6-pin: P012 P021 P022 P023
channel class PCAL9539A_16-bit_Port_Expander: 16xIO_1 16xIO_2 16xIO_3
net class QSPI: PA2 PA3 PA6 PA7 PB0 PB1
net class PF[0..1]: PF0 PF1
net class PC[0..15]: PC0 PC1 PC2 PC4 PC5 PC6 PC7 PC11 PC12 PC13 PC14 PC15
net class PB[0..15]: PB0 PB1 PB2 PB3 PB4 PB5 PB6 PB7 PB8 PB9 PB10 PB12 PB15
net class PA[0..15]: PA0 PA1 PA2 PA3 PA4 PA5 PA6 PA7 PA8 PA9 PA10 PA11 PA12 PA13 PA14 PA15
net class GPIO[0..39]: GPIO0 GPIO1 GPIO2 GPIO3 GPIO4 GPIO5 GPIO6 GPIO7 GPIO8 GPIO9 GPIO10 GPIO11 GPIO12 GPIO13 GPIO14 GPIO15 GPIO16 GPIO17 GPIO18 GPIO19 GPIO21 GPIO22 GPIO23 GPIO27 GPIO32 GPIO33 GPIO35
net class DIO_3_[0..15]: DIO_3_0 DIO_3_1 DIO_3_2 DIO_3_3 DIO_3_4 DIO_3_5 DIO_3_6 DIO_3_7 DIO_3_8 DIO_3_9 DIO_3_10 DIO_3_11 DIO_3_12 DIO_3_13 DIO_3_14 DIO_3_15
net class DIO_2_[0..15]: DIO_2_8 DIO_2_9 DIO_2_10 DIO_2_11 DIO_2_12 DIO_2_13 DIO_2_14 DIO_2_15
net class DIO_1_[0..15]: DIO_1_0 DIO_1_1 DIO_1_2 DIO_1_3 DIO_1_4 DIO_1_5 DIO_1_6 DIO_1_7 DIO_1_8 DIO_1_9 DIO_1_10 DIO_1_11 DIO_1_12 DIO_1_13 DIO_1_14 DIO_1_15
component class USB_SW: C73 C74 D22 R125 R126 R127 R129 U21
component class USB_MUX: C66 R123 R124 U17
component class +4V2_PS: C57 C58 C59 C60 L2 R97 R98 R99 U14
component class STM32G473CETx: B1 C11 C12 C98 C99 C100 C101 C102 C103 C104 C105 C106 C107 C108 C109 C110 C111 D4 FB5 NT1 NT2 Q13 R4 R5 R6 R18 R19 R20 R130 R131 R132 R133 R134 R135 R136 R137 R138 R139 R140 TP27 U26 X3
component class P110: C50 C51 C52 C53 C54 C55 R78 R79 R80 R81 R82 R83 R84 R85 R86 R87 R88 R89 R90 U13
component class P109: C21 C22 C23 C24 C25 C26 C27 C28 C29 C30 C31 C32 C33 C34 C35 C36 C38 D12 D13 D14 D15 D16 FB1 FB2 FB3 Q3 Q4 Q5 Q6 Q7 Q8 Q9 R37 R38 R39 R40 R41 R42 R43 R44 R45 R46 R47 R48 R49 R50 R51 R52 R55 R56 R57 R58 TP25 TP26 U6 U7 U8 U9 U10 X6 X7
component class U_ESP32-WROOM32D_Module: C40 C41 C42 C43 ESP32_MOD Q10 Q11 R59 R60 R61 R62 R63 R64 R65 R66 R67
component class P102: C71 C72 P102 U20
component class P31.1: C81 C82 C83 C84 C85 C86 C87 OLED R110 R111
component class P012: C9 D5 X1
component class P021: C10 D6 X2
component class JTAG: C56 D17 J1 R91 R92 R93 R94 R95 X8
component class TCPC: C95 C96 C97 D21 D22 P10 Q12 R114 R115 R116 R117 R118 R119 R120 R121 R122 R123 R124 R125 R126 R127 R128 R129 U25
component class U_CP2102N_USB-to-UART_Bridge: C75 C76 C77 C78 LD1 R102 R103 R104 R105 R106 R107 R108 U22
component class DISP_PS: C90 C91 C92 C93 C94 D19 D20 FB4 L4 R112 R113 U24
component class BC: C1 C2 C3 C4 C5 C6 C7 C8 D1 D2 D3 L1 P18 P19 P19.1 R1 R2 R3 U1
component class FiducialMark: FID1 FID2 FID3
component class P105: C120 U32
component class 16xIO_3: C117 C118 J10 J11 J12 J13 R144 U30
component class 16xIO_2: C115 C116 J6 J7 J8 J9 U29
component class 16xIO_1: C113 C114 J2 J3 J4 J5 U28
component class "U_TPS22810 2": C121 C122 C123 R157 R158 U33
component class +1V8_PS: C145 C146 U40
net class B2_[0..7]: B2_0 B2_1 B2_2 B2_3 B2_4 B2_5 B2_6 B2_7
net class B1_[0..7]: B1_0 B1_1 B1_2 B1_3 B1_4 B1_5 B1_6 B1_7
net class A2_[0..7]: A2_0 A2_1 A2_2 A2_3 A2_4 A2_5 A2_6 A2_7
net class A1_[0..7]: A1_0 A1_1 A1_2 A1_3 A1_4 A1_5 A1_6 A1_7
component class UART_MUX: C65 R37 R38 U16
component class +1V8_VLT1: C69 C70 U19
component class +1V8_VLT2: C67 C68 U18
channel class "TXB0108 Voltage_Level_Translator": +1V8_VLT1 +1V8_VLT2
component class U_TS3USBCA410_USB_C_SBU_Multiplexer: C143 C144 C155 R121 R122 R128 U39
component class P022: C141 D24 X9
component class P023: C142 D25 X10
component class TestPoint: TP1 TP2 TP3 TP4 TP5 TP6 TP7 TP8 TP9 TP10 TP11 TP12 TP13 TP14 TP15 TP16 TP17 TP18 TP19 TP20 TP21 TP22 TP23 TP24 TP25 TP26 TP27 TP28 TP?
component class AUTH: C124 U34
component class P128: C147 C148 NT3 NT4 U41
differential pair D: +D_P -D_N
differential pair CMC_D: +CMC_D_P -CMC_D_N
differential pair D3_USB_MUX: +D3_USB_MUX_P -D3_USB_MUX_N
differential pair D2_USB_MUX: +D2_USB_MUX_P -D2_USB_MUX_N
differential pair D1_USB_MUX: +D1_USB_MUX_P -D1_USB_MUX_N
differential pair CONN_D: +CONN_D_P -CONN_D_N

## Components (designator, comment, footprint, x,y, rotation, side; value= is the part's Value field where it differs from the comment)
B1 "CAP 11MF 3.3V SURFACE MNT" CAPCP3225X100N 2075,1550 r0 bottom
BTN1 "RESET" "SWITCH USLPT2819DT2TR TACTILE TE" 1520,600 r0 bottom
BTN2 "BOOT" "SWITCH USLPT2819DT2TR TACTILE TE" 1520,450 r0 bottom
C1 "CAP CER 1UF 16V X5R 0603" C0603 175,445 r0 top value=1uF (schematic designator C4)
C2 "CAP CER 0.047UF 50V X7R 0402" C0402 400,500 r0 top (schematic designator C5)
C3 "CAP CER 4.7UF 10V X5R 0603" C0603 400,555 r180 top (schematic designator C6)
C4 "CAP CER 10UF 25V X7R 1206" C1206 225,550 r0 top (schematic designator C7)
C5 "CAP CER 10uF X7R 10% 0805" C0805 495,235 r270 bottom (schematic designator C8)
C6 "CAP CER 10uF X7R 10% 0805" C0805 675,500 r180 top (schematic designator C9)
C7 "CAP CER 10uF X7R 10% 0805" C0805 675,320 r180 top (schematic designator C10)
C8 "CAP CER 10uF X7R 10% 0805" C0805 675,410 r180 top (schematic designator C11)
C9 "CAP CER 0.1UF 50V X7R 0402" C0402 2075,925 r180 bottom (schematic designator C1)
C10 "CAP CER 0.1UF 50V X7R 0402" C0402 2075,2275 r180 bottom (schematic designator C1)
C11 "CAP CER 5.6PF 50V NPO 0402" C0402 2215,1530 r0 top (schematic designator C12)
C12 "CAP CER 5.6PF 50V NPO 0402" C0402 2135,1530 r180 top (schematic designator C13)
C13 "CAP ALUM 68 UF 20% 25 V SMD" WCAP-ASLI_6.3X5.5 950,250 r180 top (schematic designator C17)
C14 "CAP ALUM 68 UF 20% 25 V SMD" WCAP-ASLI_6.3X5.5 950,950 r180 top (schematic designator C18)
C15 "CAP ALUM 68 UF 20% 25 V SMD" WCAP-ASLI_6.3X5.5 950,650 r180 top (schematic designator C19)
C16 "CAP CER 1UF 6.3V X5R 0402" C0402 1675,100 r90 bottom (schematic designator C20)
C17 "CAP CER 0.1UF 50V X7R 0402" C0402 1575,300 r270 bottom (schematic designator C21)
C18 "CAP CER 0.1UF 50V X7R 0402" C0402 1245,300 r90 bottom (schematic designator C22)
C19 "CAP CER 1UF 6.3V X5R 0402" C0402 2270,2625 r270 top (schematic designator C29)
C20 "CAP CER 0.1UF 50V X7R 0402" C0402 325,2510 r180 bottom (schematic designator C30)
C21 "CAP CER 0.1UF 50V X7R 0402" C0402 2490,2130 r0 bottom (schematic designator C31)
C22 "CAP CER 0.1UF 50V X7R 0402" C0402 3725,1975 r180 bottom (schematic designator C47)
C23 "CAP CER 0.1UF 50V X7R 0402" C0402 3315,1630 r180 bottom (schematic designator C37)
C24 "CAP CER 2.2UF 6.3V X5R 0402" C0402 3315,1560 r180 bottom (schematic designator C38)
C25 "CAP ALUM 100 UF 20% 6.3 V SMD" WCAP-ASLI_5X5.5 3700,2075 r90 top (schematic designator C39)
C26 "CAP ALUM 100 UF 20% 6.3 V SMD" WCAP-ASLI_5X5.5 3700,1725 r270 top (schematic designator C40)
C27 "CAP CER 0.1UF 50V X7R 0402" C0402 3235,2550 r90 top (schematic designator C41)
C28 "CAP CER 0.1UF 50V X7R 0402" C0402 3525,1750 r180 top (schematic designator C42)
C29 "CAP CER 33PF 50V C0G/NPO 0402" C0402 3285,2550 r90 top (schematic designator C43)
C30 "CAP CER 33PF 50V C0G/NPO 0402" C0402 3525,1700 r180 top (schematic designator C44)
C31 "CAP CER 10PF 50V C0G/NP0 0402" C0402 3335,2550 r90 top (schematic designator C45)
C32 "CAP CER 10PF 50V C0G/NP0 0402" C0402 3525,1650 r180 top (schematic designator C46)
C33 "DNP*" C0402 2825,2545 r270 top (schematic designator C32)
C34 "DNP*" C0402 3400,2530 r0 top (schematic designator C33)
C35 "DNP*" C0402 2675,2545 r270 top (schematic designator C34)
C36 "DNP*" C0402 3400,2570 r0 top (schematic designator C35)
C37 "C 100pF 50V C0G, NP0 0402" C0402 3520,2570 r0 top (schematic designator C36)
C38 "CAP CER 10nF 25V X7R 10% 0402" C0402 2575,1850 r90 top (schematic designator C48)
C39 "CAP CER 0.1UF 50V X7R 0402" C0402 3050,2025 r270 bottom (schematic designator C49)
C40 "CAP CER 0.1UF 16V X7R 0402" C0402 440,2200 r90 top (schematic designator C1)
C41 "CAP CER 10UF 16V X5R 0603" C0603 330,2200 r90 top (schematic designator C2)
C42 "CAP CER 10UF 16V X5R 0603" C0603 390,2200 r90 top (schematic designator C3)
C43 "CAP CER 0.1UF 16V X7R 0402" C0402 340,2390 r0 bottom (schematic designator C4)
C44 "CAP CER 0.1UF 50V X7R 0402" C0402 1150,2500 r90 bottom (schematic designator C23)
C45 "CAP CER 0.1UF 50V X7R 0402" C0402 750,2500 r90 bottom (schematic designator C24)
C46 "CAP CER 1UF 6.3V X5R 0402" C0402 1015,2500 r90 top (schematic designator C25)
C47 "CAP CER 1UF 6.3V X5R 0402" C0402 615,2500 r90 top (schematic designator C26)
C48 "DNP*" C0402 925,2650 r270 bottom (schematic designator C27)
C49 "DNP*" C0402 525,2650 r270 bottom (schematic designator C28)
C50 "CAP CER 10nF 25V X7R 10% 0402" C0402 1975,550 r270 bottom (schematic designator C1)
C51 "CAP CER 1000PF 50V X7R 0402" C0402 2095,550 r270 bottom (schematic designator C2)
C52 "CAP CER 1UF 6.3V X5R 0402" C0402 1850,385 r90 bottom (schematic designator C3)
C53 "CAP CER 0.022UF 25V X7R 0402" C0402 1890,465 r90 bottom (schematic designator C4)
C54 "CAP CER 22UF 25V X5R 0805" C0805 1984.41,265 r180 bottom (schematic designator C5)
C55 "CAP CER 2.2UF 16V X5R 0603" C0603 2130,275 r0 bottom (schematic designator C6)
C56 "CAP CER 1UF 6.3V X5R 0402" C0402 2200,2075 r180 bottom (schematic designator C1)
C57 "CAP CER 10uF X7R 10% 0805" C0805 3790,1475 r90 top (schematic designator C1)
C58 "CAP CER 0.1UF 50V X7R 0402" C0402 3600,1255 r0 top (schematic designator C2)
C59 "CAP CER 22UF 10V X5R 0805" C0805 3625,1475 r270 top (schematic designator C3)
C60 "CAP CER 22UF 10V X5R 0805" C0805 3710,1475 r270 top (schematic designator C4)
C61 "CAP CER 22UF 25V X5R 0805" C0805 1110,1425 r90 top (schematic designator C1)
C62 "CAP CER 0.1UF 16V X7R 0402" C0402 1185,1295 r90 top (schematic designator C2)
C63 "CAP CER 10nF 25V X7R 10% 0402" C0402 1225,1295 r90 top (schematic designator C3)
C64 "CAP CER 22UF 25V X5R 0805" C0805 1225,1510 r180 top (schematic designator C4)
C65 "CAP CER 0.1UF 50V X7R 0402" C0402 3125,1115 r0 bottom (schematic designator C1)
C66 "CAP CER 0.1UF 50V X7R 0402" C0402 540,1125 r90 top (schematic designator C1)
C67 "CAP CER 0.1UF 50V X7R 0402" C0402 3065,1425 r0 bottom (schematic designator C28)
C68 "CAP CER 0.1UF 50V X7R 0402" C0402 3065,1325 r180 bottom (schematic designator C30)
C69 "CAP CER 0.1UF 50V X7R 0402" C0402 2575,1660 r270 bottom (schematic designator C28)
C70 "CAP CER 0.1UF 50V X7R 0402" C0402 2475,1660 r90 bottom (schematic designator C30)
C71 "CAP CER 2.2UF 6.3V X5R 0402" C0402 3700,625 r0 top (schematic designator C1)
C72 "CAP CER 0.1UF 50V X7R 0402" C0402 3225,575 r0 bottom (schematic designator C2)
C73 "CAP CER 1UF 25V X5R 0603" C0603 390,1035 r90 bottom (schematic designator C1)
C74 "CAP CER 0.1UF 50V X7R 0402" C0402 400,950 r180 bottom (schematic designator C2)
C75 "CAP CER 0.1UF 16V X7R 0402" C0402 255,1285 r90 bottom (schematic designator C1)
C76 "CAP CER 4.7UF 16V X5R 0603" C0603 200,1335 r0 top (schematic designator C2)
C77 "CAP CER 4.7UF 16V X5R 0603" C0603 200,1275 r0 top (schematic designator C3)
C78 "CAP CER 0.1UF 16V X7R 0402" C0402 295,1285 r90 bottom (schematic designator C4)
C79 "CAP CER 10UF 16V X5R 0603" C0603 3105,625 r90 top (schematic designator C1)
C80 "CAP CER 0.1UF 16V X7R 0402" C0402 3050,605 r90 top (schematic designator C2)
C81 "CAP CER 4.7UF 10V X5R 0603" C0603 2950,1250 r0 bottom (schematic designator C1)
C82 "CAP CER 0.1UF 50V X7R 0402" C0402 2925,1200 r0 bottom (schematic designator C2)
C83 "CAP CER 1UF 16V X5R 0603" C0603 2950,1070 r0 bottom value=1uF (schematic designator C3)
C84 "CAP CER 2.2UF 16V X5R 0603" C0603 2950,1675 r180 bottom (schematic designator C4)
C85 "CAP CER 4.7UF 16V X5R 0603" C0603 2935,1775 r0 bottom (schematic designator C5)
C86 "CAP CER 1UF 16V X5R 0603" C0603 2950,1000 r0 bottom value=1uF (schematic designator C6)
C87 "CAP CER 0.1UF 50V X7R 0402" C0402 2925,1725 r0 bottom (schematic designator C7)
C88 "CAP CER 1UF 16V X5R 0402" C0402 570,775 r270 bottom (schematic designator C1)
C89 "CAP CER 0.1UF 50V X7R 0402" C0402 390,660 r0 bottom (schematic designator C2)
C90 "CAP CER 10UF 16V X5R 0603" C0603 3500,1220 r0 top (schematic designator C1)
C91 "CAP CER 0.1UF 50V X7R 0402" C0402 3660,1200 r90 top (schematic designator C2)
C92 "CAP CER 10UF 16V X7R 0805" C0805 3500,915 r180 top (schematic designator C3)
C93 "CAP CER 10UF 16V X5R 0603" C0603 3335,1210 r270 top (schematic designator C4)
C94 "CAP CER 10UF 16V X5R 0603" C0603 3275,1210 r90 top (schematic designator C5)
C95 "CAP CER 220PF 50V X7R 0402" C0402 635,675 r90 bottom (schematic designator C1)
C96 "CAP CER 4.7UF 35V X7R 0805" C0805 150,750 r180 top (schematic designator C2)
C97 "CAP CER 220PF 50V X7R 0402" C0402 685,875 r270 bottom (schematic designator C3)
C98 "CAP CER 10uF X7R 10% 0805" C0805 1475,1935 r180 bottom (schematic designator C1)
C99 "CAP CER 0.1UF 50V X7R 0402" C0402 1475,1475 r270 top (schematic designator C2)
C100 "CAP CER 0.1UF 50V X7R 0402" C0402 1950,1450 r0 top (schematic designator C3)
C101 "CAP CER 0.1UF 50V X7R 0402" C0402 2010,1475 r270 top (schematic designator C4)
C102 "CAP CER 0.1UF 50V X7R 0402" C0402 1975,1925 r90 top (schematic designator C5)
C103 "CAP CER 0.1UF 50V X7R 0402" C0402 1500,1950 r180 top (schematic designator C6)
C104 "CAP CER 0.1UF 50V X7R 0402" C0402 1685,1865 r180 bottom (schematic designator C7)
C105 "CAP CER 1UF 16V X5R 0402" C0402 1685,1785 r180 bottom (schematic designator C8)
C106 "CAP CER 0.1UF 50V X7R 0402" C0402 1605,1865 r0 bottom (schematic designator C9)
C107 "CAP CER 1UF 16V X5R 0402" C0402 1605,1785 r0 bottom (schematic designator C10)
C108 "CAP CER 0.1UF 50V X7R 0402" C0402 2050,1665 r0 bottom (schematic designator C11)
C109 "CAP CER 0.1UF 50V X7R 0402" C0402 2075,1785 r180 bottom (schematic designator C14)
C110 "CAP CER 0.1UF 50V X7R 0402" C0402 2075,1745 r180 bottom (schematic designator C15)
C111 "CAP CER 0.1UF 50V X7R 0402" C0402 2075,1905 r180 bottom (schematic designator C16)
C112 "CAP CER 0.1UF 50V X7R 0402" C0402 1425,2075 r90 bottom (schematic designator C1)
C113 "CAP CER 2.2UF 6.3V X5R 0402" C0402 2600,725 r0 top (schematic designator C1)
C114 "CAP CER 0.1UF 50V X7R 0402" C0402 2600,765 r0 top (schematic designator C2)
C115 "CAP CER 2.2UF 6.3V X5R 0402" C0402 2175,1825 r180 top (schematic designator C1)
C116 "CAP CER 0.1UF 50V X7R 0402" C0402 2175,1785 r180 top (schematic designator C2)
C117 "CAP CER 2.2UF 6.3V X5R 0402" C0402 980,1420 r0 top (schematic designator C1)
C118 "CAP CER 0.1UF 50V X7R 0402" C0402 980,1380 r0 top (schematic designator C2)
C119 "CGA2B3X7R1H104K050BB" C0402 1550,2490 r90 top (schematic designator C1)
C120 "CAP CER 0.1UF 50V X7R 0402" C0402 1235,2325 r270 top (schematic designator C1)
C121 "CAP CER 2.2UF 35V X5R 0603" C0603 2135,2605 r0 top (schematic designator C1)
C122 "CAP CER 0.1UF 16V X7R 0402" C0402 1880,2525 r180 top (schematic designator C2)
C123 "CAP CER 2.2UF 35V X5R 0603" C0603 1820,2625 r270 top (schematic designator C3)
C124 "CAP CER 0.1UF 50V X7R 0402" C0402 685,1775 r0 top (schematic designator C1)
C125 "CAP CER 0.1UF 16V X7R 0402" C0402 1710,2525 r180 top (schematic designator C1)
C126 "CAP CER 0.1UF 16V X7R 0402" C0402 1635,2560 r270 top (schematic designator C2)
C127 "CAP 11MF 3.3V SURFACE MNT" CAPCP3225X100N 1650,2320 r0 bottom (schematic designator C3)
C128 "CAP CER 0.1UF 50V X7R 0402" C0402 1625,1040 r180 top (schematic designator C1)
C129 "CAP CER 0.1UF 50V X7R 0402" C0402 1510,1200 r0 top (schematic designator C2)
C130 "CAP CER 22UF 25V X5R 0805" C0805 1675,925 r180 top (schematic designator C3)
C131 "CAP CER 0.1UF 50V X7R 0402" C0402 1625,990 r180 top (schematic designator C4)
C132 "CAP CER 1800PF 50V X7R 0402" C0402 1490,1140 r270 top (schematic designator C5)
C133 "CAP CER 1UF 16V X5R 0402" C0402 1180,1065 r270 top (schematic designator C6)
C134 "CAP CER 10UF 16V X7R 0805" C0805 1520,845 r180 top (schematic designator C7)
C135 "CAP CER 10UF 16V X7R 0805" C0805 1520,760 r180 top (schematic designator C8)
C136 "CAP CER 22UF 25V X5R 0805" C0805 1225,710 r180 top (schematic designator C9)
C137 "CAP CER 22UF 25V X5R 0805" C0805 1225,630 r180 top (schematic designator C10)
C138 "CAP CER 22UF 25V X5R 0805" C0805 1225,550 r180 top (schematic designator C11)
C139 "CAP CER 1UF 16V X5R 0402" C0402 2510,2325 r180 top (schematic designator C1)
C140 "CAP CER 0.1UF 50V X7R 0402" C0402 2510,2285 r180 top (schematic designator C2)
C141 "CAP CER 0.1UF 50V X7R 0402" C0402 2075,1150 r180 bottom (schematic designator C1)
C142 "CAP CER 0.1UF 50V X7R 0402" C0402 2075,700 r180 bottom (schematic designator C1)
C143 "CAP CER 1UF 16V X5R 0402" C0402 740,1125 r90 top (schematic designator C1)
C144 "CAP CER 0.1UF 50V X7R 0402" C0402 700,1125 r90 top (schematic designator C2)
C145 "CAP CER 2.2UF 6.3V X5R 0402" C0402 1700,2570 r0 top (schematic designator C1)
C146 "CAP CER 2.2UF 6.3V X5R 0402" C0402 1700,2680 r0 top (schematic designator C2)
C147 "CAP CER 0.1UF 50V X7R 0402" C0402 2650,1125 r180 top (schematic designator C1)
C148 "CAP CER 0.1UF 50V X7R 0402" C0402 2610,1010 r0 top (schematic designator C2)
D1 "ESDA7P120-1U1M" ST_QFN_1610 560,250 r90 bottom (schematic designator D3)
D2 "ESDA7P120-1U1M" ST_QFN_1610 270,115 r180 bottom (schematic designator D4)
D3 "ESDA7P120-1U1M" ST_QFN_1610 630,250 r90 bottom (schematic designator D5)
D4 "NSR0140P2T5G" SODFL100X40-2N 2135,1670 r0 bottom (schematic designator D6)
D5 "SMF05CT1G" SOT363_SOP65P210X265-6N 1800,1025 r90 bottom (schematic designator D1)
D6 "SMF05CT1G" SOT363_SOP65P210X265-6N 1800,2375 r90 bottom (schematic designator D1)
D7 "SR05-02CTG" SOT-143 1350,300 r180 bottom
D8 "NSR0140P2T5G" SODFL100X40-2N 2225,2600 r270 top
D9 "ESDA7P120-1U1M" ST_QFN_1610 325,2625 r180 bottom
D10 "NSR0140P2T5G" SODFL100X40-2N 925,550 r90 bottom
D11 "RESERVED" LED_0603 2375,2625 r270 bottom
D12 "MM3Z5V1C" SOD-323F 2600,2200 r90 bottom
D13 "LED RED CLEAR 0603 SMD" LED_0603 2925,2625 r270 bottom
D14 "LED GREEN CLEAR 0603 SMD" LED_0603 2825,2625 r270 bottom
D15 "LED BLUE CLEAR 0603 SMD" LED_0603 3025,2625 r270 bottom
D16 "ESDA7P120-1U1M" ST_QFN_1610 3475,1475 r90 top
D17 "SMF05CT1G" SOT363_SOP65P210X265-6N 1775,2150 r90 bottom (schematic designator D1)
D18 "+3V3" LED_0603 1350,1325 r90 bottom (schematic designator D1)
D19 "STPS120MF" SODFL375X95-2N 3305,1050 r270 top (schematic designator D1)
D20 "MMSZ5226B-7-F" SOD-123 3835,1025 r270 top (schematic designator D2)
D21 "ESDA25P35-1U1M" ST_QFN_1610 170,875 r180 top (schematic designator D1)
D22 "NSR0140P2T5G" SODFL100X40-2N 450,1075 r90 bottom (schematic designator D2)
D23 "PMEG4050EP,115" SOD-128 1275,825 r0 top (schematic designator D1)
D24 "SMF05CT1G" SOT363_SOP65P210X265-6N 1800,1250 r90 bottom (schematic designator D1)
D25 "SMF05CT1G" SOT363_SOP65P210X265-6N 1800,800 r90 bottom (schematic designator D1)
ESP32_MOD "ESP32-WROOM-32D" MODULE_ESP32-WROOM-32D 525,1975 r270 bottom
FB1 "Not Fitted in BG95-M3_Global Variant" L0603 3400,1350 r270 top
FB2 "MPZ1608S300ATAH0" L0603 3400,1475 r270 top
FB3 "MPZ1608S300ATAH0" L0603 3540,1475 r270 top
FB4 "FERRITE BEAD 470 OHM 0603 1LN" L0603 3750,1175 r180 top (schematic designator FB1)
FB5 "FERRITE BEAD 1 KOHM 0402 1LN" L0402 1605,1745 r180 bottom (schematic designator FB1)
FB6 "FERRITE BEAD 1 KOHM 0402 1LN" L0402 1180,985 r90 top (schematic designator FB1)
FID1 "N/A" FIDUCIAL 100,2475 r0 top
FID2 "N/A" FIDUCIAL 100,300 r90 top
FID3 "N/A" FIDUCIAL 3700,250 r90 top
G1 "Logo_ESD" Logo_ESD 3765,1690 r90 bottom
Ground&PowerPlanes_1 "Number & Stacking Stripe" SIGNAL-1 2421.26,212.6 r0 top
Ground&PowerPlanes_2 "Number & Stacking Stripe" PLANE-2 2421.26,212.6 r0 top
Ground&PowerPlanes_3 "Number & Stacking Stripe" PLANE-3 2421.26,212.6 r0 top
Ground&PowerPlanes_4 "Number & Stacking Stripe" SIGNAL-4 2421.26,212.6 r0 top
Ground&PowerPlanes_5 "Number & Stacking Stripe" SIGNAL-5 2421.26,212.6 r0 top
Ground&PowerPlanes_6 "Number & Stacking Stripe" SIGNAL-6 2421.26,212.6 r0 bottom
J1 "NO Bridge" NO_SOLDERBRIDGE_0603 1765,2275 r0 top
J2 "NO Bridge" NO_SOLDERBRIDGE_0603 2575,625 r0 bottom (schematic designator J1)
J3 "NC Bridge" NC_SOLDERBRIDGE_0603 2450,625 r0 bottom net-tie (schematic designator J2)
J4 "NO Bridge" NO_SOLDERBRIDGE_0603 2600,725 r270 bottom (schematic designator J3)
J5 "NC Bridge" NC_SOLDERBRIDGE_0603 2600,850 r270 bottom net-tie (schematic designator J4)
J6 "NC Bridge" NC_SOLDERBRIDGE_0603 2175,1925 r180 bottom net-tie (schematic designator J5)
J7 "NO Bridge" NO_SOLDERBRIDGE_0603 2300,1925 r180 bottom (schematic designator J6)
J8 "NO Bridge" NO_SOLDERBRIDGE_0603 2175,2000 r180 bottom (schematic designator J7)
J9 "NC Bridge" NC_SOLDERBRIDGE_0603 2299,2000 r180 bottom net-tie (schematic designator J8)
J10 "NO Bridge" NO_SOLDERBRIDGE_0603 1075,1240 r270 bottom (schematic designator J9)
J11 "NC Bridge" NC_SOLDERBRIDGE_0603 1150,1240 r90 bottom net-tie (schematic designator J10)
J12 "NC Bridge" NC_SOLDERBRIDGE_0603 875,1465 r180 bottom net-tie (schematic designator J11)
J13 "NO Bridge" NO_SOLDERBRIDGE_0603 875,1390 r0 bottom (schematic designator J12)
L1 "FIXED IND 1UH 5A 24 MOHM SMD" IND_IHLP-1212B00 525,400 r270 top
L2 "FIXED IND 1UH 2.4A 54 MOHM MAX" IND_WE_LQSH_3012 3750,1325 r180 top (schematic designator L1)
L3 "FIXED IND 1UH 2.5A 75 MOHM SMD" 74438323010 1350,1425 r90 top (schematic designator L1)
L4 "FIXED IND COUIPLED 6.8UH 1.2A 160 mOHM SMD" IND_LPD5030 3500,1075 r0 top (schematic designator L1)
L5 "FIXED IND COUIPLED 2.2UH 3.2A 22 MOHM SMD" IND_MSD1048H 1525,500 r270 top (schematic designator L1)
LD1 "150066M153000" LED_0606_RGB_WURTH 175,1535 r180 bottom
Logo1 "Logo ACME_CPU" LOGO_ACME_CPU 3805,1150 r90 bottom (schematic designator Logo)
MNT1 "MountHole M2. Nothing to buy or mount" MOUNTHOLE_M2 118.11,2637.8 r0 top
MNT2 "MountHole M2. Nothing to buy or mount" MOUNTHOLE_M2 118.11,118.11 r0 top
MNT3 "MountHole M2. Nothing to buy or mount" MOUNTHOLE_M2 3818.9,2637.8 r0 top
MNT4 "MountHole M2. Nothing to buy or mount" MOUNTHOLE_M2 3818.9,118.11 r0 top
NT1 "Net Tie" "NET TIE 6X30MIL" 1445,1592 r180 top net-tie
NT2 "Net Tie" "NET TIE 6X30MIL" 1445,1604 r180 top net-tie
NT3 "Net Tie" "NET TIE 6X30MIL" 2502.8,1108.02 r135 top net-tie
NT4 "Net Tie" "NET TIE 6X30MIL" 2500,1025 r180 top net-tie
OLED "QG-2864KSWEG01" QG-2864KSWEG01_FLIPPED 2800,1377.95 r0 bottom locked
P09 "\"PWR\"" LED_0603 2675,2625 r270 bottom
P10 "USB" MOLEX_2012670005 156.3,825 r90 bottom (schematic designator P1)
P15 "\"ON\"" LED_0603 2575,2625 r270 bottom
P16 "DC Motor" CONN_S4B-ZR(LF)(SN) 1300,100 r0 top
P18 "BATT" CONN_S3B-ZR_JST 625,100 r0 top
P19 "THERMISTOR NTC 10KOHM 3380K 0603" R0603 375,115 r0 bottom
P19.1 "\"Batt Temp\"" CONN_S2B-ZR_JST 375,100 r0 top
P20 "S201" CONN_0545500571 1025,2650 r180 top
P22 "BLDC I2C" CONN_S5B-ZR(LF)(SN) 1675,100 r0 top
P23 "\"SYS_FAULT\"" LED_0603 2475,2625 r270 bottom
P24 "BUZZ" SMT-0440-S-R_PUI 2225,2600 r270 bottom
P25 "Stepper Motor" CONN_S4B-ZR(LF)(SN) 2075,100 r0 top
P28 "S202" CONN_0545500571 625,2650 r180 top
P102 "uSD Card" 5025700893 3622.05,600 r90 bottom (schematic designator X1)
Q1 "DMN32D2LV-7" SON_400UV-7_DIO 1350,650 r270 bottom (schematic designator Q3)
Q2 "BSS816NWH6327XTSA1" SOT-323 2275,2525 r180 top (schematic designator Q4)
Q3 "DTC143ZET1G" SOT-416FL_ONS 2800,2315 r0 bottom (schematic designator Q7)
Q4 "DTC143ZET1G" SOT-416FL_ONS 2800,2225 r0 bottom (schematic designator Q8)
Q5 "DTC143ZET1G" SOT-416FL_ONS 2725,2380 r0 bottom (schematic designator Q9)
Q6 "DTC143ZET1G" SOT-416FL_ONS 2825,2400 r0 bottom (schematic designator Q10)
Q7 "DTC143ZET1G" SOT-416FL_ONS 2500,1900 r0 top (schematic designator Q11)
Q8 "DTC143ZET1G" SOT-416FL_ONS 2500,1800 r0 top (schematic designator Q12)
Q9 "DMN32D2LV-7" SON_400UV-7_DIO 3125,2025 r90 bottom (schematic designator Q13)
Q10 "BC847CW,115" SOT-323 520,2025 r0 top (schematic designator Q5)
Q11 "BC847CW,115" SOT-323 400,2025 r180 top (schematic designator Q6)
Q12 "DMN32D2LV-7" SON_400UV-7_DIO 660,775 r270 bottom (schematic designator Q1)
Q13 "EM6M2T2R" SON_400UV-7_DIO 850,175 r180 bottom (schematic designator Q2)
Q14 "BC847CW,115" SOT-323 1295,1175 r90 top (schematic designator Q1)
R1 "RES SMD 10K OHM 1% 1/16W 0402" R0402 275,275 r180 bottom (schematic designator R18)
R2 "RES SMD 31.6K OHM 1% 1/16W 0402" R0402 275,235 r0 bottom (schematic designator R19)
R3 "RES SMD 5.36K OHM 1% 1/16W 0402" R0402 275,195 r0 bottom (schematic designator R20)
R4 "RES SMD 10K OHM 1% 1/16W 0402" R0402 1620,475 r270 bottom (schematic designator R21)
R5 "RES SMD 2.7K OHM 1% 1/16W 0402" R0402 1475,2325 r270 top (schematic designator R22)
R6 "RES SMD 2.7K OHM 1% 1/16W 0402" R0402 1515,2325 r270 top (schematic designator R23)
R7 "RES SMD 100K OHM 1% 1/16W 0402" R0402 2825,625 r270 top (schematic designator R24)
R8 "RES SMD 100K OHM 1% 1/16W 0402" R0402 2805,685 r180 top (schematic designator R25)
R9 "RES SMD 100K OHM 1% 1/16W 0402" R0402 2785,625 r270 top (schematic designator R26)
R10 "RES SMD 100K OHM 1% 1/16W 0402" R0402 850,1590 r0 top (schematic designator R27)
R11 "RES SMD 100K OHM 1% 1/16W 0402" R0402 875,1850 r180 top (schematic designator R28)
R12 "RES SMD 100K OHM 1% 1/16W 0402" R0402 525,2445 r0 top (schematic designator R29)
R13 "RES SMD 100K OHM 1% 1/16W 0402" R0402 525,2405 r0 top (schematic designator R30)
R14 "RES SMD 100K OHM 1% 1/16W 0402" R0402 1775,550 r90 top (schematic designator R31)
R15 "RES SMD 100K OHM 1% 1/16W 0402" R0402 2575,865 r270 top (schematic designator R32)
R16 "RES SMD 100K OHM 1% 1/16W 0402" R0402 1015,1740 r0 top (schematic designator R33)
R17 "RES SMD 100K OHM 1% 1/16W 0402" R0402 2010,1395 r180 top (schematic designator R34)
R18 "RES SMD 0 OHM JUMPER 1/16W 0402" R0402 1780,1475 r90 bottom (schematic designator R35)
R19 "RES SMD 0 OHM JUMPER 1/16W 0402" R0402 1725,1475 r90 bottom (schematic designator R36)
R20 "RES SMD 10 OHM 1% 1/16W 0402" R0402 2050,1625 r180 top (schematic designator R37)
R21 "RES SMD 10K OHM 1% 1/16W 0402" R0402 1330,550 r270 bottom (schematic designator R46)
R22 "RES SMD 0 OHM JUMPER 1/16W 0402" R0402 1330,445 r270 bottom (schematic designator R47)
R23 "RES SMD 0 OHM JUMPER 1/16W 0402" R0402 1370,445 r270 bottom (schematic designator R48)
R24 "RES SMD 10K OHM 1% 1/16W 0402" R0402 1370,550 r270 bottom (schematic designator R49)
R25 "RES SMD 10K OHM 1% 1/16W 0402" R0402 1290,445 r270 bottom (schematic designator R50)
R26 "RES SMD 10K OHM 1% 1/16W 0402" R0402 1410,445 r270 bottom (schematic designator R51)
R27 "DNP*" R0402 1410,550 r270 bottom (schematic designator R52)
R28 "DNP*" R0402 425,2625 r180 bottom (schematic designator R58)
R29 "RES SMD 0 OHM JUMPER 1/16W 0402" R0402 425,2510 r180 bottom (schematic designator R59)
R30 "DNP*" R0402 425,2550 r0 bottom (schematic designator R60)
R31 "RES SMD 10K OHM 1% 1/16W 0402" R0402 2360,2525 r90 top (schematic designator R61)
R32 "RES SMD 402 OHM 1% 1/16W 0402" R0402 2725,2625 r90 bottom value=22k (schematic designator R62)
R33 "RES SMD 402 OHM 1% 1/16W 0402" R0402 2625,2625 r90 bottom value=22k (schematic designator R63)
R34 "RES SMD 402 OHM 1% 1/16W 0402" R0402 2525,2625 r90 bottom value=22k (schematic designator R64)
R35 "RES SMD 402 OHM 1% 1/16W 0402" R0402 2425,2625 r90 bottom value=22k (schematic designator R65)
R36 "RES SMD 0 OHM JUMPER 1/16W 0402" R0402 1090,225 r90 bottom (schematic designator R66)
R37 "RES SMD 10K OHM 1% 1/16W 0402" R0402 3125,1155 r180 bottom (schematic designator R80)
R38 "RES SMD 10K OHM 1% 1/16W 0402" R0402 3125,1195 r180 bottom (schematic designator R81)
R39 "RES SMD 0 OHM JUMPER 1/16W 0402" R0402 2625,2100 r180 bottom (schematic designator R82)
R40 "DNP*" R0402 2625,2060 r180 bottom (schematic designator R83)
R41 "DNP*" R0402 2625,2015 r180 bottom (schematic designator R84)
R42 "RES SMD 10K OHM 1% 1/16W 0402" R0402 2490,2170 r0 bottom (schematic designator R85)
R43 "RES SMD 2K OHM 1% 1/16W 0402" R0402 2975,2625 r90 bottom (schematic designator R86)
R44 "RES SMD 2K OHM 1% 1/16W 0402" R0402 2875,2625 r90 bottom (schematic designator R87)
R45 "RES SMD 10K OHM 1% 1/16W 0402" R0402 2775,2625 r270 bottom (schematic designator R88)
R46 "RES SMD 2K OHM 1% 1/16W 0402" R0402 3075,2625 r90 bottom (schematic designator R89)
R47 "RES SMD 15K OHM 1% 1/16W 0402" R0402 3350,2195 r270 bottom (schematic designator R92)
R48 "RES SMD 0 OHM JUMPER 1/16W 0402" R0402 3350,2275 r90 bottom (schematic designator R93)
R49 "RES SMD 0 OHM JUMPER 1/16W 0402" R0402 3310,2275 r90 bottom (schematic designator R94)
R50 "RES SMD 0 OHM JUMPER 1/16W 0402" R0402 3270,2275 r90 bottom (schematic designator R95)
R51 "RES SMD 0 OHM JUMPER 1/16W 0402" R0402 2750,2525 r180 top (schematic designator R90)
R52 "RES SMD 0 OHM JUMPER 1/16W 0402" R0402 3460,2550 r90 top (schematic designator R91)
R53 "RES SMD 5.1K OHM 1% 1/16W 0402" R0402 3225,1560 r180 bottom (schematic designator R96)
R54 "RES SMD 100K OHM 1% 1/16W 0402" R0402 3145,1560 r0 bottom (schematic designator R97)
R55 "RES SMD 10K OHM 1% 1/16W 0402" R0402 3145,1925 r270 bottom (schematic designator R98)
R56 "RES SMD 100K OHM 1% 1/16W 0402" R0402 3105,1925 r90 bottom (schematic designator R99)
R57 "RES SMD 10K OHM 1% 1/16W 0402" R0402 3105,2125 r90 bottom (schematic designator R100)
R58 "RES SMD 100K OHM 1% 1/16W 0402" R0402 3145,2125 r270 bottom (schematic designator R101)
R59 "RES SMD 100 OHM 1% 1/16W 0402" R0402 520,2200 r270 top (schematic designator R1)
R60 "RES SMD 10K OHM 1% 1/16W 0402" R0402 480,2200 r90 top (schematic designator R2)
R61 "RES SMD 0 OHM JUMPER 1/16W 0402" R0402 560,2200 r270 top (schematic designator R67)
R62 "RES SMD 10K OHM 1% 1/16W 0402" R0402 460,2100 r0 top (schematic designator R68)
R63 "RES SMD 10K OHM 1% 1/16W 0402" R0402 460,1950 r180 top (schematic designator R69)
R64 "DNP*" R0402 975,1700 r0 top (schematic designator R70)
R65 "DNP*" R0402 695,1735 r180 top (schematic designator R71)
R66 "RES SMD 2.7K OHM 1% 1/16W 0402" R0402 615,1735 r0 top (schematic designator R72)
R67 "RES SMD 2.7K OHM 1% 1/16W 0402" R0402 350,1750 r90 top (schematic designator R73)
R68 "RES SMD 100K OHM 1% 1/16W 0402" R0402 3105,1025 r90 top (schematic designator R74)
R69 "RES SMD 100K OHM 1% 1/16W 0402" R0402 3145,1025 r90 top (schematic designator R75)
R70 "RES SMD 100 OHM 1% 1/16W 0402" R0402 870,1650 r90 top (schematic designator R76)
R71 "RES SMD 100 OHM 1% 1/16W 0402" R0402 855,1910 r90 top (schematic designator R77)
R72 "RES SMD 100 OHM 1% 1/16W 0402" R0402 725,2350 r0 top (schematic designator R78)
R73 "RES SMD 100 OHM 1% 1/16W 0402" R0402 700,2225 r180 top (schematic designator R79)
R74 "RES SMD 0 OHM JUMPER 1/16W 0402" R0402 1130,2435 r180 bottom (schematic designator R53)
R75 "RES SMD 0 OHM JUMPER 1/16W 0402" R0402 730,2440 r180 bottom (schematic designator R54)
R76 "DNP*" R0402 965,2650 r90 bottom (schematic designator R55)
R77 "DNP*" R0402 565,2650 r90 bottom (schematic designator R56)
R78 "RES SMD 68.1K OHM 1% 1/16W 0402" R0402 1850,465 r90 bottom (schematic designator R1)
R79 "RES SMD 18.2K OHM 1% 1/16W 0402" R0402 2055,550 r90 bottom (schematic designator R2)
R80 "RES SMD 18.2K OHM 1% 1/16W 0402" R0402 2015,550 r90 bottom (schematic designator R3)
R81 "RES SMD 360KOHM 1% 1/16W 0402" R0402 1810,465 r90 bottom (schematic designator R4)
R82 "RES SMD 10K OHM 1% 1/16W 0402" R0402 1810,385 r90 bottom (schematic designator R5)
R83 "RES SMD 1K OHM 1% 1/16W 0402" R0402 1950,485 r0 bottom (schematic designator R6)
R84 "RES SMD 47K OHM 1% 1/16W 0402" R0402 1950,445 r0 bottom (schematic designator R7)
R85 "RES SMD 10K OHM 1% 1/16W 0402" R0402 2215,465 r180 bottom (schematic designator R8)
R86 "RES SMD 10K OHM 1% 1/16W 0402" R0402 2215,425 r180 bottom (schematic designator R9)
R87 "RES SMD 10K OHM 1% 1/16W 0402" R0402 2175,550 r270 bottom (schematic designator R10)
R88 "RES SMD 10K OHM 1% 1/16W 0402" R0402 2135,550 r270 bottom (schematic designator R11)
R89 "RES SMD 2.2 OHM 5% 1W 2512" R2512 1900,525 r270 top (schematic designator R12)
R90 "RES SMD 2.2 OHM 5% 1W 2512" R2512 2250,525 r270 top (schematic designator R13)
R91 "RES SMD 100 OHM 1% 1/16W 0402" R0402 920,2320 r90 top (schematic designator R1)
R92 "RES SMD 100 OHM 1% 1/16W 0402" R0402 1100,2150 r180 top (schematic designator R2)
R93 "RES SMD 100 OHM 1% 1/16W 0402" R0402 1100,1800 r180 top (schematic designator R3)
R94 "RES SMD 100 OHM 1% 1/16W 0402" R0402 965,2320 r90 top (schematic designator R4)
R95 "RES SMD 100 OHM 1% 1/16W 0402" R0402 600,2200 r270 top (schematic designator R5)
R96 "RES SMD 0 OHM JUMPER 1/16W 0402" R0402 1050,1400 r270 top (schematic designator R1)
R97 "RES SMD 100K OHM 1% 1/16W 0402" R0402 3500,1300 r0 top (schematic designator R1)
R98 "RES SMD 100K OHM 1% 1/16W 0402" R0402 3500,1345 r0 top (schematic designator R2)
R99 "RES SMD 536K OHM 1% 1/16W 0402" R0402 3500,1385 r180 top (schematic designator R3)
R100 "RES SMD 0 OHM JUMPER 1/16W 0402" R0402 1265,1295 r90 top (schematic designator R1)
R101 "RES SMD 402 OHM 1% 1/16W 0402" R0402 1350,1450 r90 bottom (schematic designator R2)
R102 "RES SMD 23.7K OHM 1% 1/16W 0402" R0402 200,950 r270 top (schematic designator R1)
R103 "RES ARRAY 8 RES 100K OHM 1606" YAG_YC248 475,1825 r90 top (schematic designator R2)
R104 "RES SMD 402 OHM 1% 1/16W 0402" R0402 200,1515 r180 top (schematic designator R3)
R105 "RES SMD 402 OHM 1% 1/16W 0402" R0402 200,1555 r180 top (schematic designator R4)